# Altium PCB VideoMuxBoard.PcbDoc (part 1 of 2)
Units mil, origin at the board's own origin, x right, y up, seen from the top; angles counter-clockwise.
Board outline 4724.41 x 4724.41 mil, 4 copper layers (Top Layer, Ground, MidLayer1, Bottom Layer); 247 components, 183 nets, 999 pads, 433 vias.
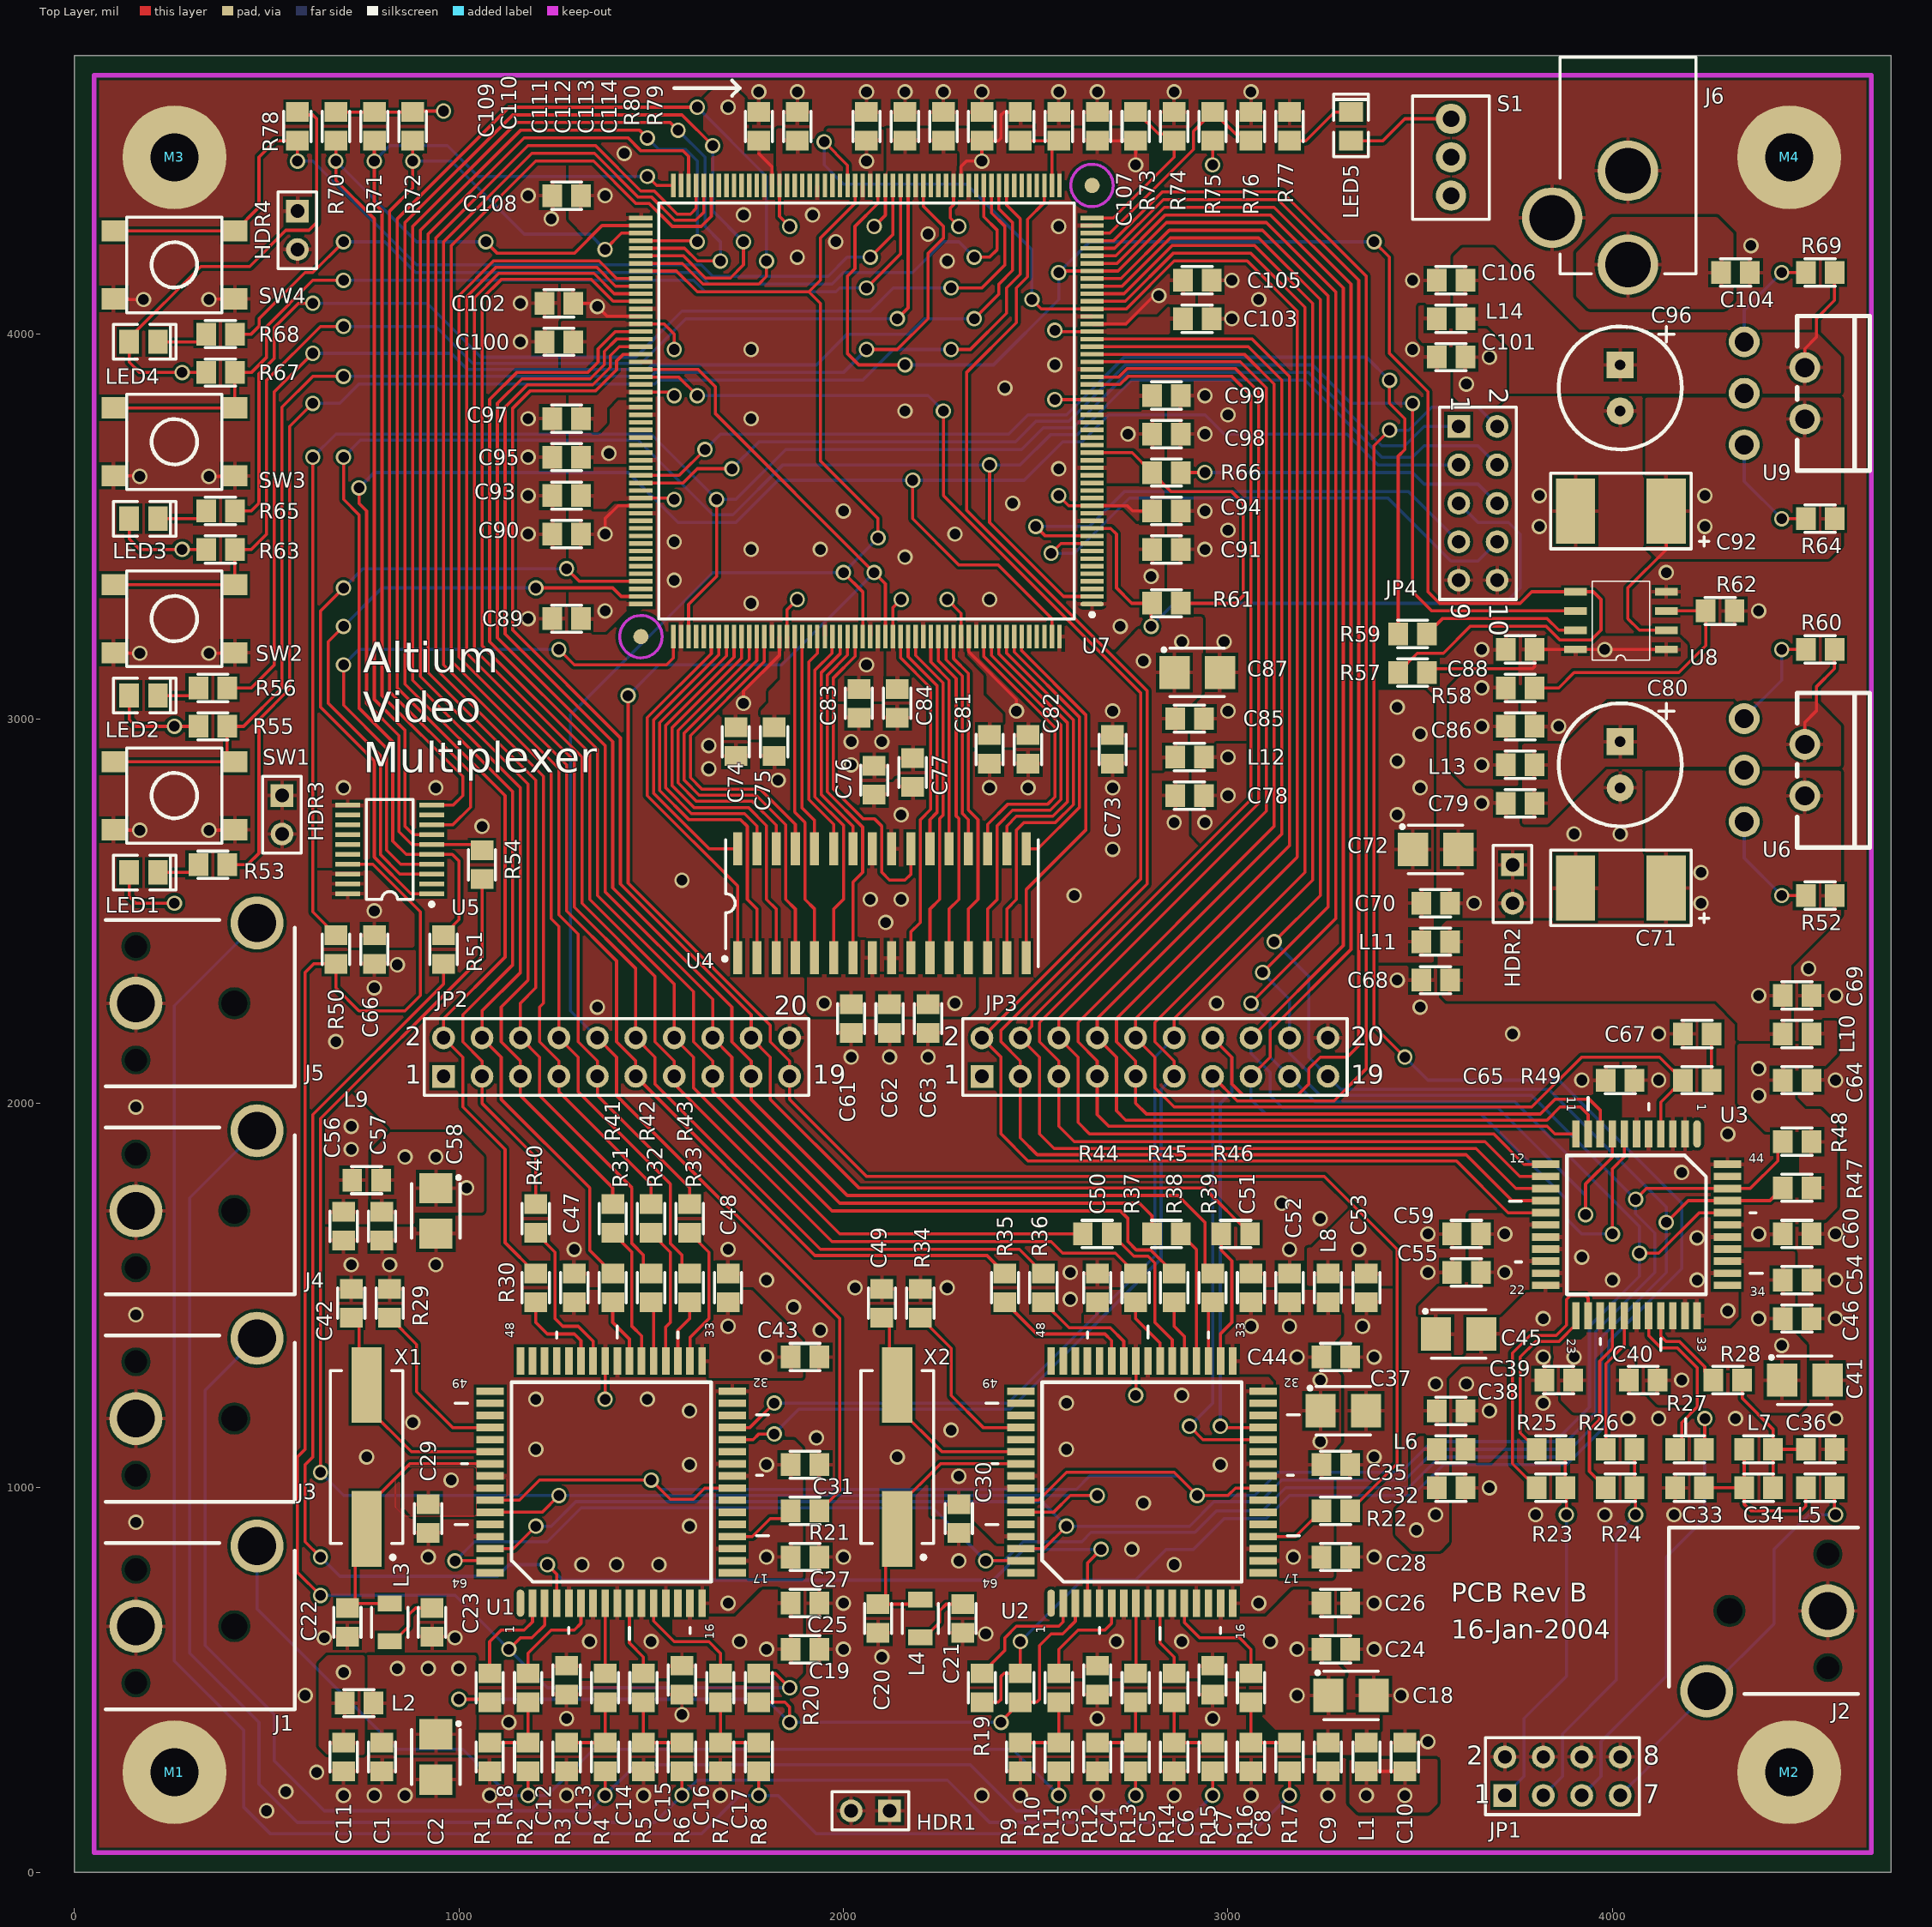
[diagram p0: Top Layer view]
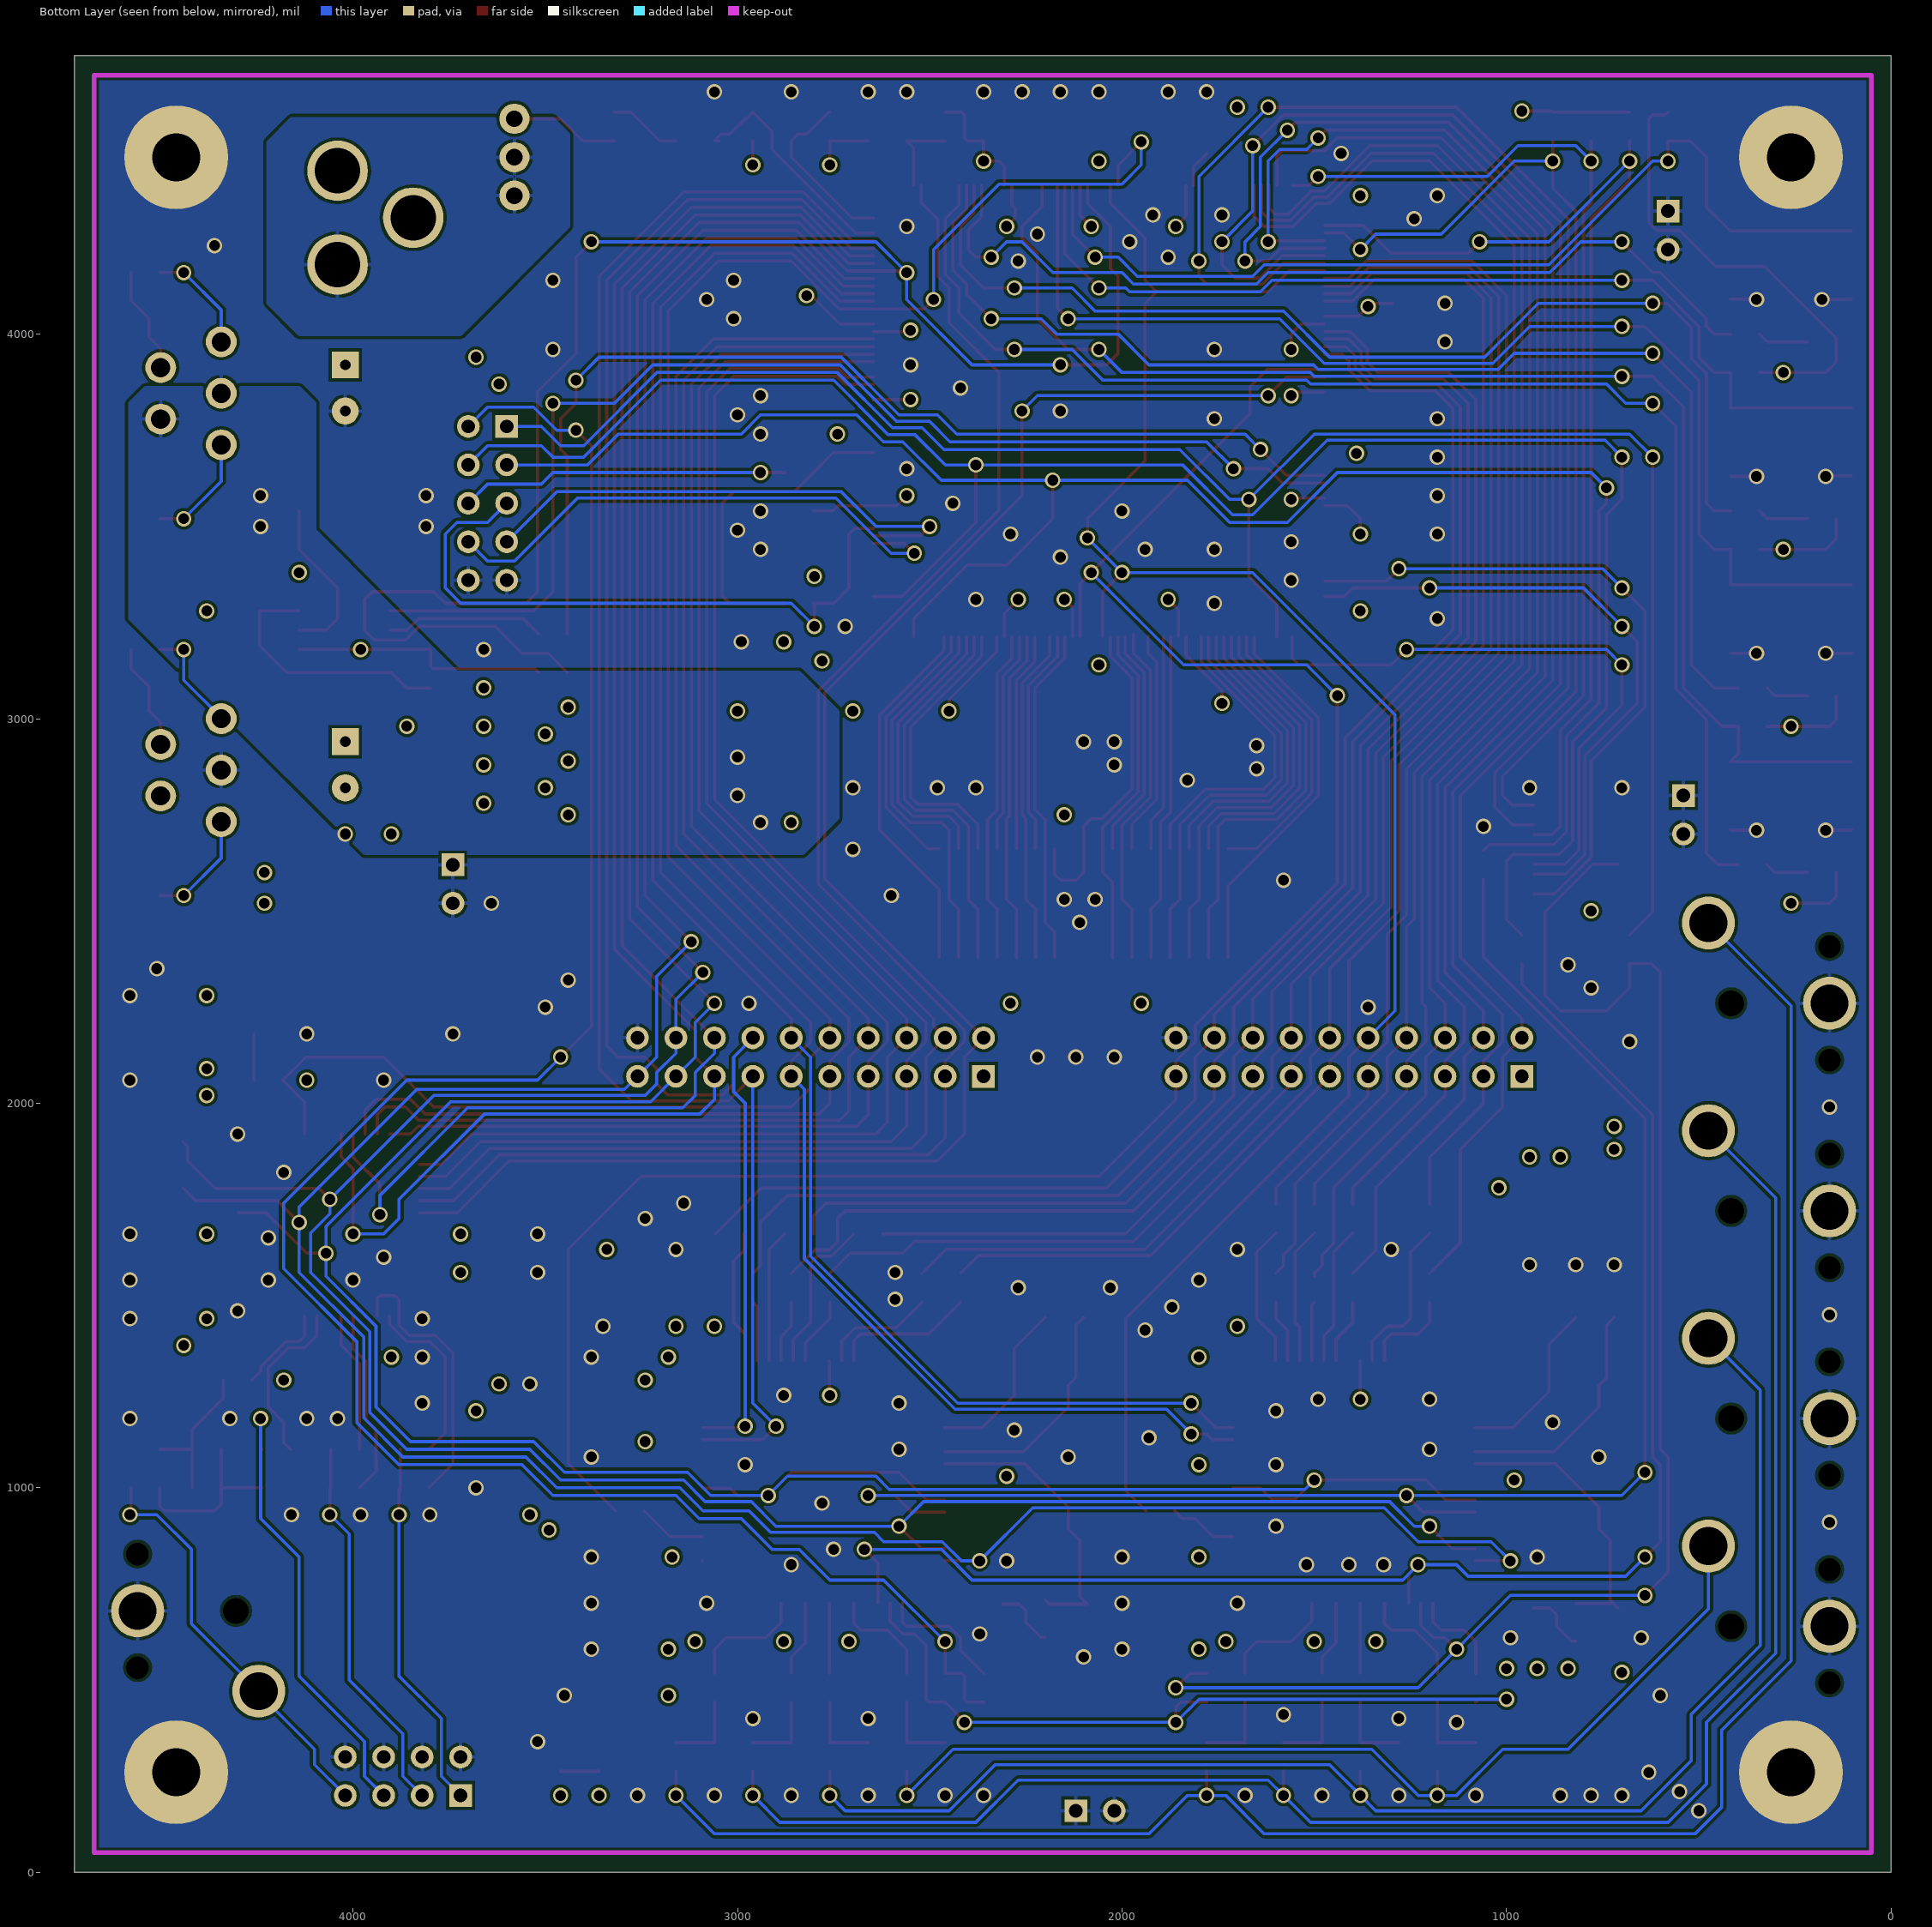
[diagram p1: Bottom Layer view, seen from below]
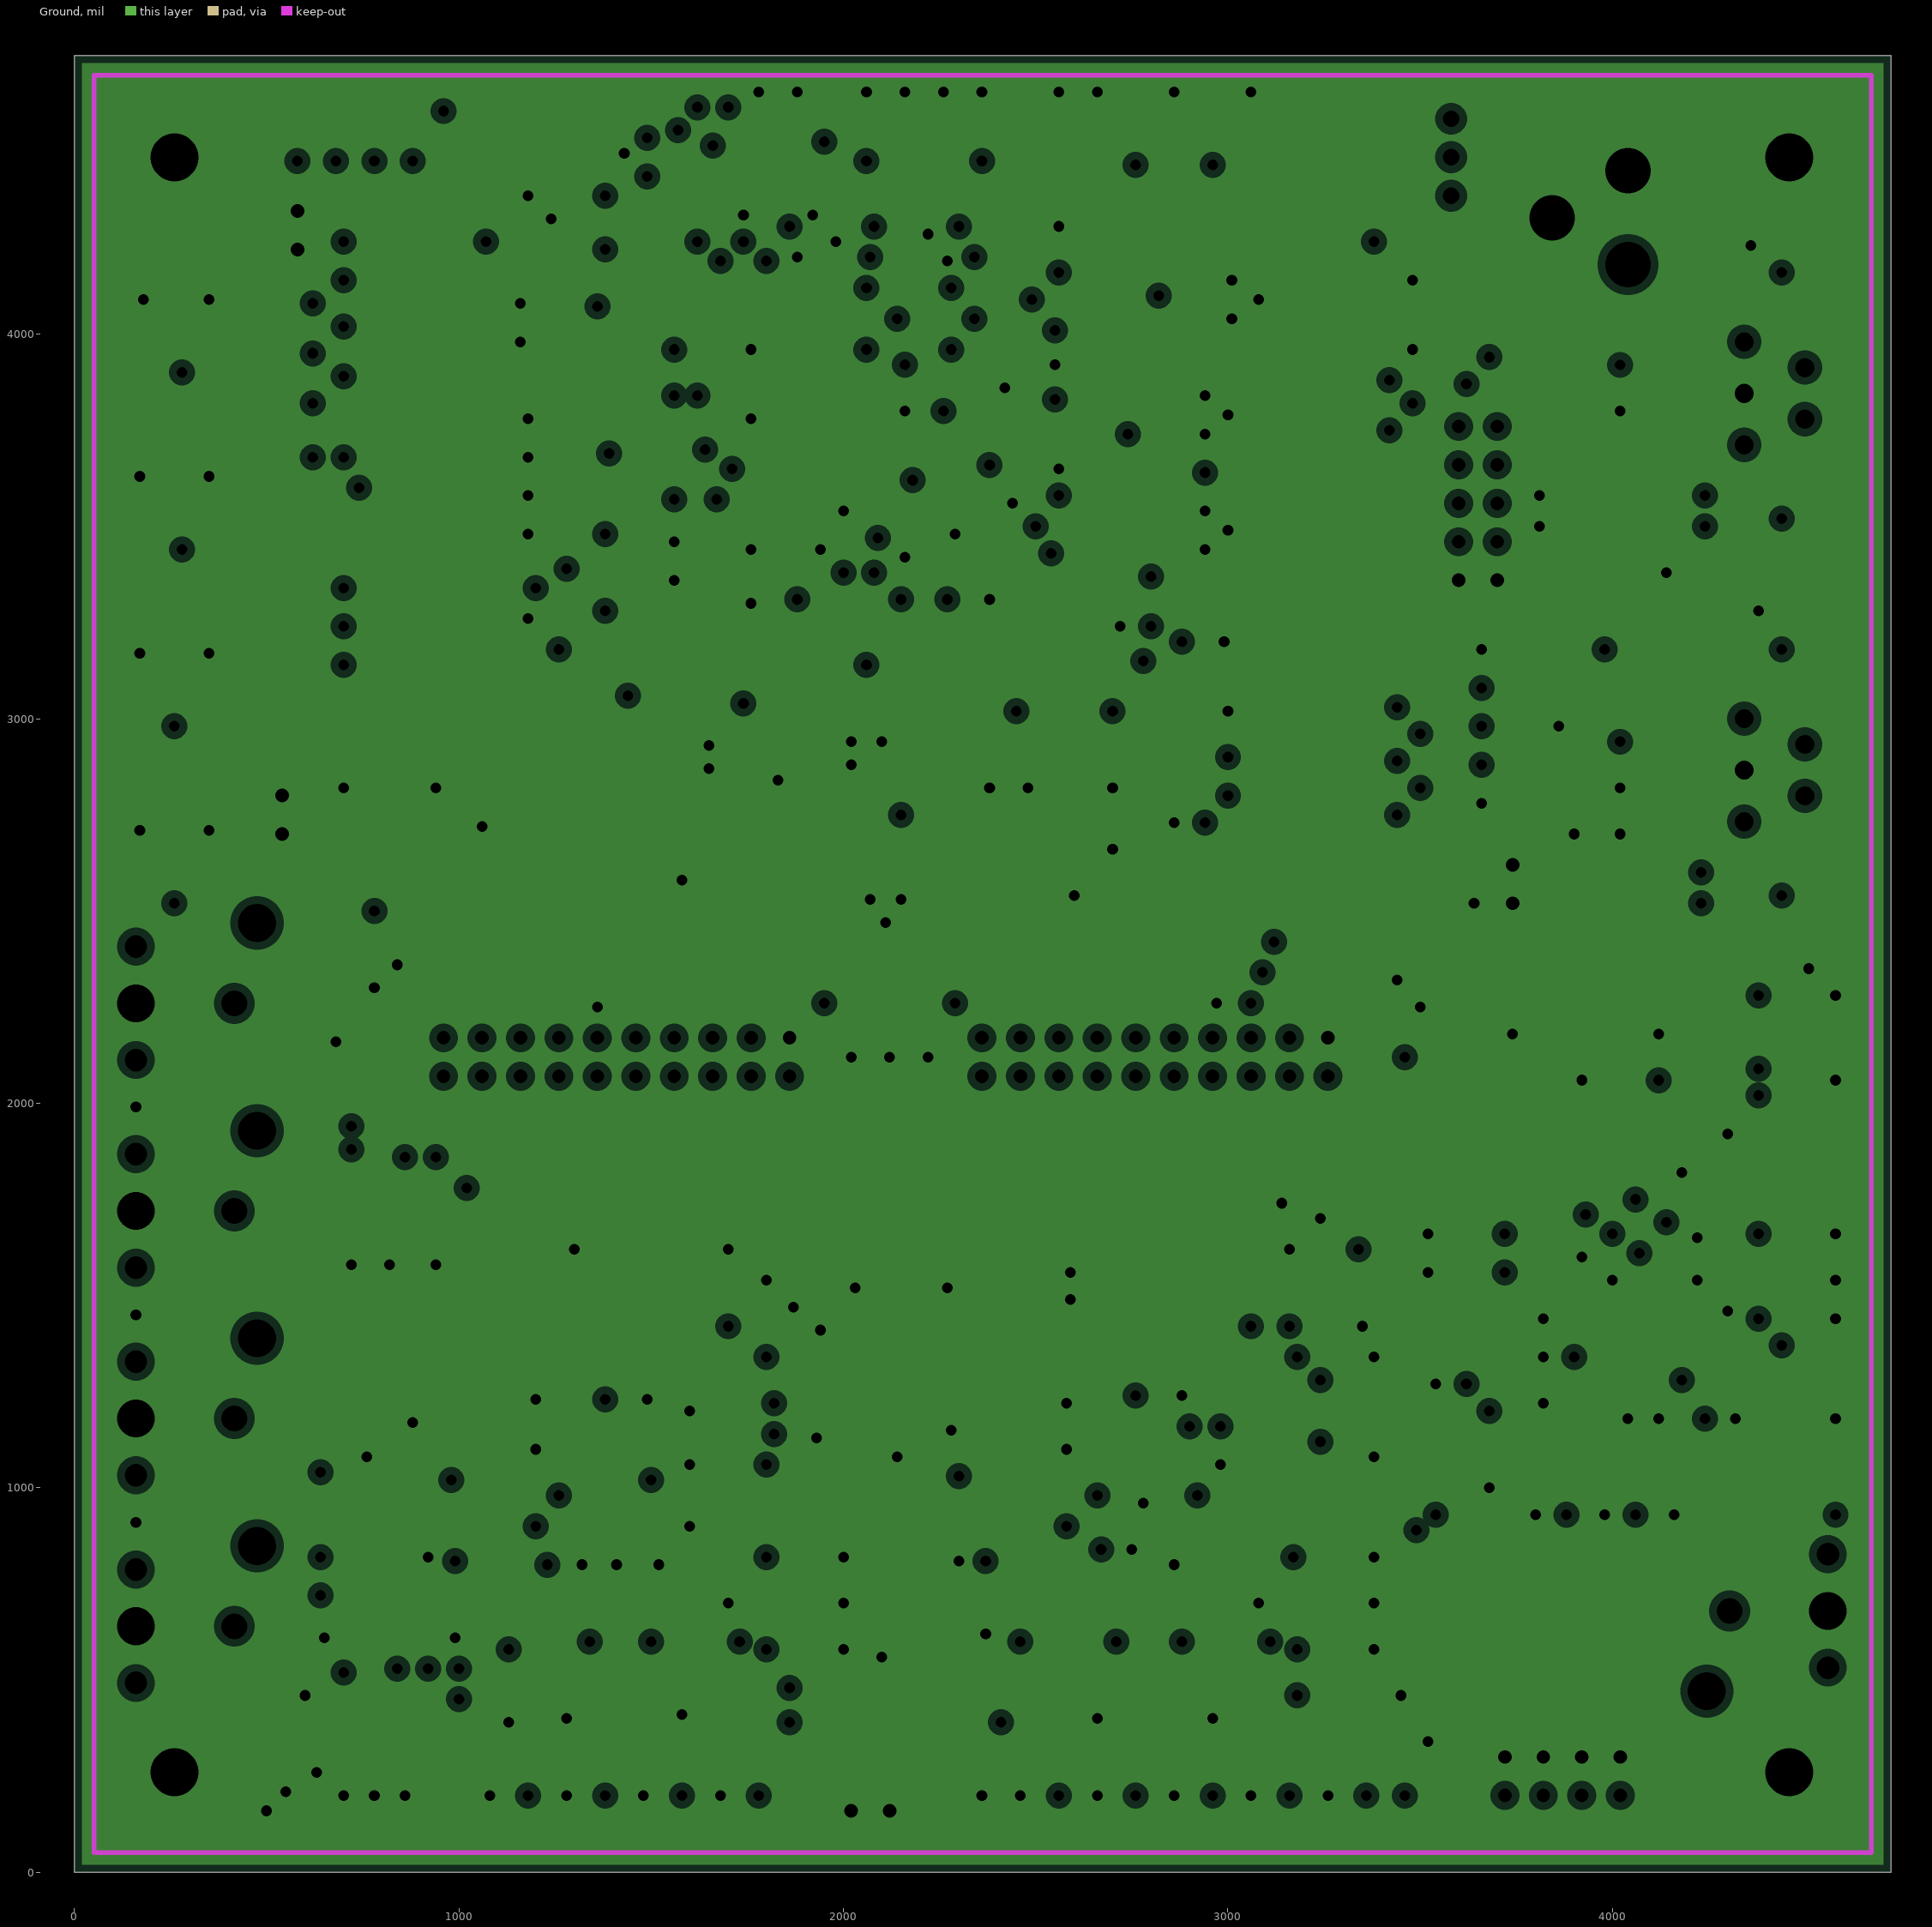
[diagram p2: Ground, clearances drawn from the general rule]
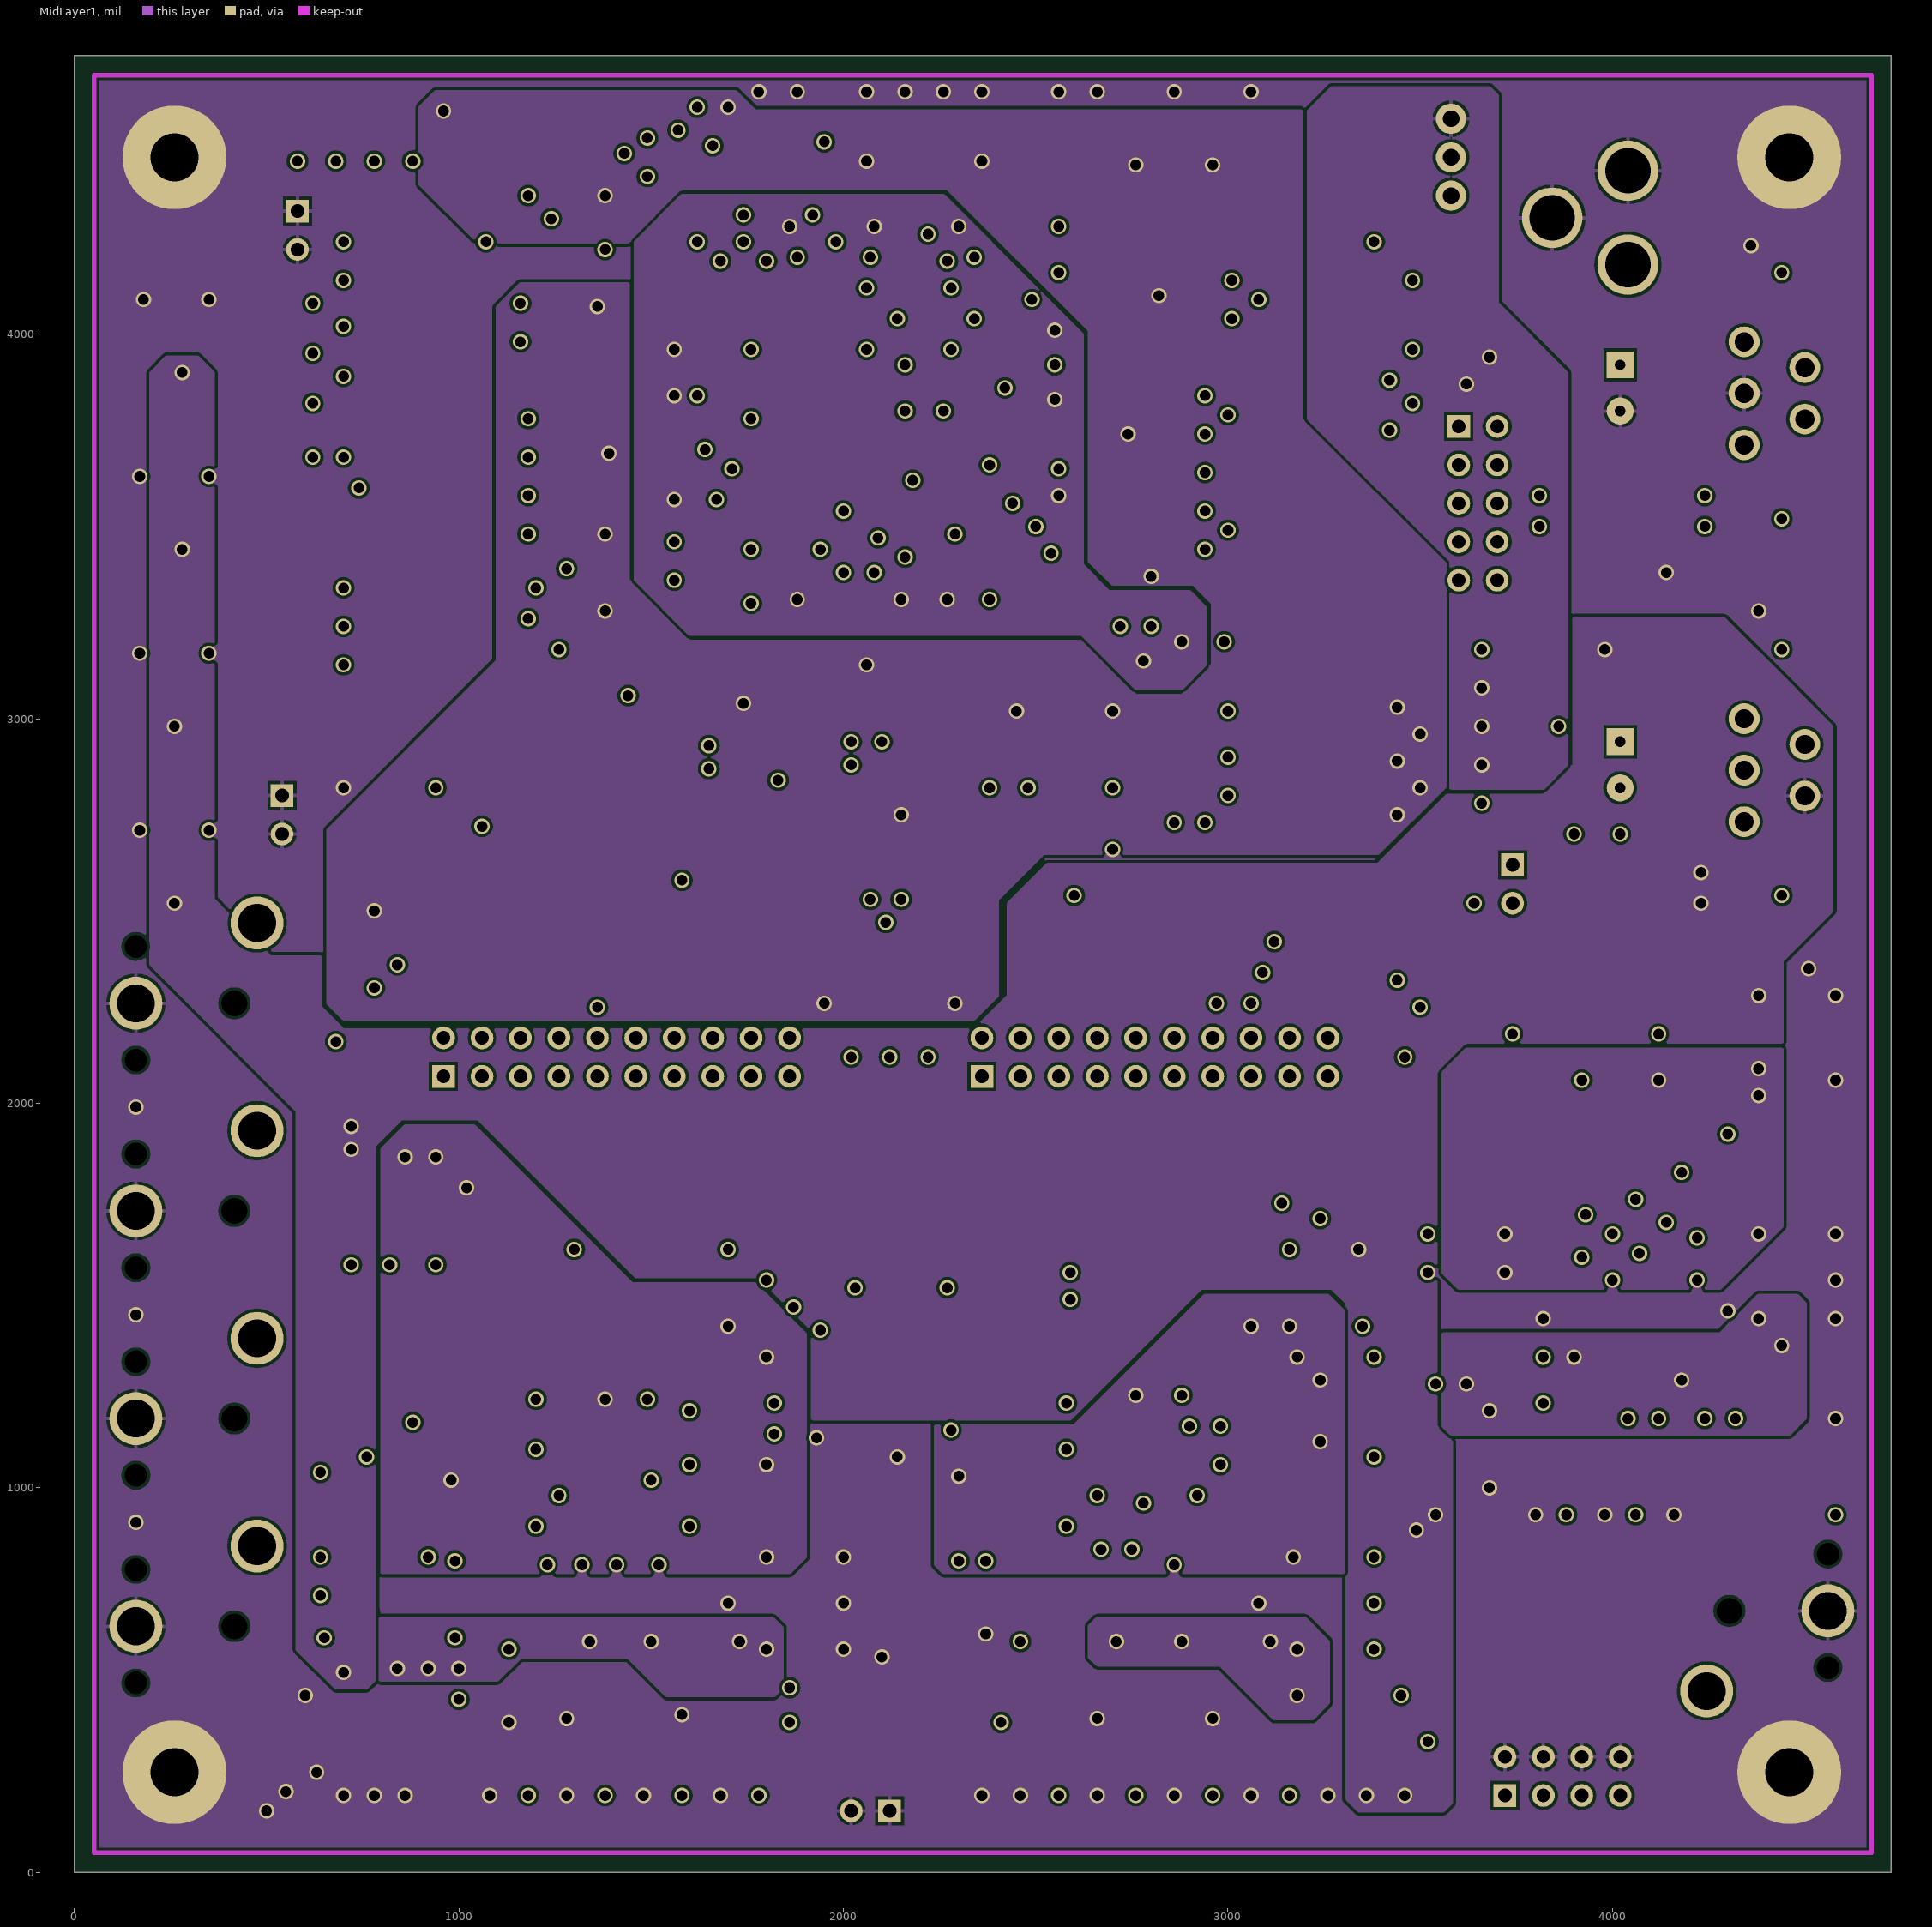
[diagram p3: MidLayer1]

## Layer stack, top to bottom
Top Layer: signal copper 1.4
Dielectric: core 12.6, FR-4, Dk 4.8
Ground: plane copper 1.4, net GND
Dielectric: prepreg 12.6, FR-4, Dk 4.8
MidLayer1: signal copper 1.4
Dielectric: core 12.6, FR-4, Dk 4.8
Bottom Layer: signal copper 1.4

## Board outline
0,0 4724.41,0 4724.41,4724.41 0,4724.41

## Design rules (kind name [scope] priority, off if disabled: settings)
Clearance [All] p1: gap=7.87
FabricationTestPointUsage TestPointUsage [All] p1: valid=0 allowmultiple=FALSE
FabricationTestpoint Testpoint [All] p1: side=3 testpointundercomponent=TRUE minsize=40 maxsize=100 preferedsize=60 minholesize=0 maxholesize=40 preferedholesize=32 testpointgrid=1 allowsidetop=TRUE allowsidebottom=TRUE usegrid=TRUE gridtolerance=0.01
HoleSize [All] p1: absolutevalues=TRUE maxlimit=150 minlimit=24 maxpercent=80.000 minpercent=20.000
PlaneClearance [All] p1: clearance=20
PlaneConnect M3PlaneConnect [(HasFootprint('SCREW M3') AND InNet('GND'))] p1: planeconnectstyle=Direct reliefexpansion=20 reliefentries=4 reliefconductorwidth=10 reliefairgap=10 // Require no thermal relief on M3 screw holes.
PlaneConnect [All] p2: planeconnectstyle=Relief reliefexpansion=20 reliefentries=4 reliefconductorwidth=10 reliefairgap=10
PolygonConnect M3PolygonConnect [(HasFootprint('SCREW M3') AND InNet('GND'))] p1: connectstyle=Direct reliefconductorwidth=10 reliefentries=4 polygonreliefangle="90 Angle" // Require no thermal relief on M3 screw holes.
PolygonConnect [All] p2: connectstyle=Relief reliefconductorwidth=10 reliefentries=4 polygonreliefangle="90 Angle"
RoutingLayers [All] p1: top layer_v5=TRUE mid layer 1_v5=FALSE bottom layer_v5=TRUE
RoutingVias [All] p1: holewidth=24 width=40 viastyle="Through Hole" minholewidth=24 minwidth=40 maxholewidth=44 maxwidth=60
SilkscreenOverComponentPads [All] p1: minsilkscreentomaskgap=10
SolderMaskExpansion [All] p1: expansion=2
Width [All] p1: maxlimit=100 minlimit=7.87 preferedwidth=8 midlayer1_maxwidth=24
21 further rules are at their usual default settings.

## Classes and differential pairs
component class U_PCB_Controller: C61 C62 C63 C66 C68 C70 C72 C73 C74 C75 C76 C77 C78 C81 C82 C83 C84 C85 C87 C89 C90 C91 C93 C94 C95 C97 C98 C99 C100 C102 C103 C105 C107 C108 C109 C110 C111 C112 C113 C114 L11 L12 R50 R61 R70 R71 R72 R73 R74 R75 R76 R79 R80 U4 U5 U7
component class U_PCB_DecoderA: C1 C2 C11 C12 C13 C14 C15 C16 C17 C19 C22 C23 C25 C27 C29 C31 C42 C43 C47 C48 C56 C57 C58 L2 L3 L9 R1 R2 R3 R4 R5 R6 R7 R8 R18 R20 R21 R29 R30 R31 R32 R33 R40 R41 R42 R43 U1 X1
component class U_PCB_DecoderB: C3 C4 C5 C6 C7 C8 C9 C10 C18 C20 C21 C24 C26 C28 C30 C35 C37 C44 C49 C50 C51 C52 C53 L1 L4 L8 R9 R10 R11 R12 R13 R14 R15 R16 R17 R19 R22 R34 R35 R36 R37 R38 R39 R44 R45 R46 U2 X2
component class U_PCB_Encoder: C32 C33 C34 C36 C38 C39 C40 C41 C45 C46 C54 C55 C59 C60 C64 C65 C67 C69 J2 JP1 L5 L6 L7 L10 R23 R24 R25 R26 R27 R28 R47 R48 R49 U3
component class U_PCB_Headers: JP2 JP3 JP4 R66
component class U_PCB_IO: J1 J3 J4 J5 LED1 LED2 LED3 LED4 LED5 R53 R55 R56 R63 R65 R67 R68 R77 R78 SW1 SW2 SW3 SW4
component class U_PCB_Power: C71 C79 C80 C86 C88 C92 C96 C101 C104 C106 HDR1 HDR2 HDR3 HDR4 J6 L13 L14 R52 R57 R58 R59 R60 R62 R64 R69 S1 U6 U8 U9
net class A[16..0]: A0 A1 A2 A3 A4 A5 A6 A7 A8 A9 A10 A11 A12 A13 A14 A15 A16
net class D[7..0]: D0 D1 D2 D3 D4 D5 D6 D7
net class KEY[3..0]: KEY0 KEY1 KEY2 KEY3
net class LED[3..0]: LED0 LED3 LED4 LED5
net class MP[7..0]: MPOUT0 MPOUT1 MPOUT2 MPOUT3 MPOUT4 MPOUT5 MPOUT6 MPOUT7
component class PCB_Top: R51 R54

## Components (designator, comment, footprint, x,y, rotation, side; value= is the part's Value field where it differs from the comment)
C1 "0.1uF" CC2012-0805 800,300 r270 top (schematic designator C54)
C2 "10uF" MCCT-B 940,300 r270 top (schematic designator C56)
C3 "22nF" CC2012-0805 2560,480 r90 top (schematic designator C86)
C4 "10nF" CC2012-0805 2660,500 r90 top (schematic designator C73)
C5 "22nF" CC2012-0805 2760,480 r90 top (schematic designator C85)
C6 "22nF" CC2012-0805 2860,480 r90 top (schematic designator C84)
C7 "10nF" CC2012-0805 2960,500 r90 top (schematic designator C74)
C8 "22nF" CC2012-0805 3060,480 r90 top (schematic designator C83)
C9 "0.1uF" CC2012-0805 3260,300 r270 top (schematic designator C77)
C10 "1nF" CC2012-0805 3460,300 r90 top (schematic designator C67)
C11 "1nF" CC2012-0805 700,300 r270 top (schematic designator C44)
C12 "22nF" CC2012-0805 1180,480 r90 top (schematic designator C63)
C13 "10nF" CC2012-0805 1280,500 r90 top (schematic designator C50)
C14 "22nF" CC2012-0805 1380,480 r90 top (schematic designator C62)
C15 "22nF" CC2012-0805 1480,480 r90 top (schematic designator C61)
C16 "10nF" CC2012-0805 1580,500 r90 top (schematic designator C51)
C17 "22nF" CC2012-0805 1680,480 r90 top (schematic designator C60)
C18 "10uF" MCCT-B 3320,460 r0 top (schematic designator C79)
C19 "1nF" CC2012-0805 1900,580 r180 top (schematic designator C43)
C20 "10pF" CC2012-0805 2090,660 r90 top (schematic designator C81)
C21 "1nF" CC2012-0805 2310,660 r90 top (schematic designator C64)
C22 "10pF" CC2012-0805 710,650 r90 top (schematic designator C58)
C23 "1nF" CC2012-0805 930,650 r90 top (schematic designator C41)
C24 "1nF" CC2012-0805 3280,580 r180 top (schematic designator C66)
C25 "1nF" CC2012-0805 1900,700 r180 top (schematic designator C42)
C26 "1nF" CC2012-0805 3280,700 r180 top (schematic designator C65)
C27 "10nF" CC2012-0805 1900,820 r0 top (schematic designator C53)
C28 "10nF" CC2012-0805 3280,820 r0 top (schematic designator C76)
C29 "100nF" CC2012-0805 920,920 r270 top (schematic designator C47)
C30 "100nF" CC2012-0805 2300,920 r270 top (schematic designator C70)
C31 "1nF" CC2012-0805 1900,1060 r0 top (schematic designator C49)
C32 "1nF" CC2012-0805 3580,1000 r0 top (schematic designator C90)
C33 "470pF" CC2012-0805 4200,1000 r180 top (schematic designator C102)
C34 "100pF" CC2012-0805 4380,1000 r180 top (schematic designator C104)
C35 "1nF" CC2012-0805 3280,1060 r0 top (schematic designator C72)
C36 "330pF" CC2012-0805 4540,1100 r0 top (schematic designator C103)
C37 "10uF" MCCT-B 3300,1200 r0 top (schematic designator C80)
C38 "0.1uF" CC2012-0805 3580,1200 r180 top (schematic designator C99)
C39 "1nF" CC2012-0805 3860,1280 r180 top (schematic designator C92)
C40 "10nF" CC2012-0805 4080,1280 r180 top (schematic designator C97)
C41 "10uF" MCCT-B 4500,1280 r0 top (schematic designator C101)
C42 "10pF" CC2012-0805 720,1480 r90 top (schematic designator C59)
C43 "1nF" CC2012-0805 1900,1340 r0 top (schematic designator C45)
C44 "1nF" CC2012-0805 3280,1340 r0 top (schematic designator C68)
C45 "10uF" MCCT-B 3600,1400 r0 top (schematic designator C100)
C46 "10nF" CC2012-0805 4480,1440 r0 top (schematic designator C96)
C47 "1nF" CC2012-0805 1300,1520 r90 top (schematic designator C48)
C48 "10nF" CC2012-0805 1700,1520 r90 top (schematic designator C52)
C49 "10pF" CC2012-0805 2100,1480 r90 top (schematic designator C82)
C50 "1nF" CC2012-0805 2660,1520 r90 top (schematic designator C71)
C51 "10nF" CC2012-0805 3060,1520 r90 top (schematic designator C75)
C52 "0.1uF" CC2012-0805 3160,1520 r90 top (schematic designator C78)
C53 "1nF" CC2012-0805 3360,1520 r270 top (schematic designator C69)
C54 "1nF" CC2012-0805 4480,1540 r0 top (schematic designator C91)
C55 "10nF" CC2012-0805 3620,1560 r0 top (schematic designator C94)
C56 "1nF" CC2012-0805 700,1680 r270 top (schematic designator C46)
C57 "0.1uF" CC2012-0805 800,1680 r270 top (schematic designator C55)
C58 "10uF" MCCT-B 940,1720 r270 top (schematic designator C57)
C59 "1nF" CC2012-0805 3620,1660 r0 top (schematic designator C88)
C60 "10nF" CC2012-0805 4480,1660 r180 top (schematic designator C95)
C61 "0.1uF" CC2012-0805 2020,2220 r270 top (schematic designator C32)
C62 "1nF" CC2012-0805 2120,2220 r270 top (schematic designator C2)
C63 "10nF" CC2012-0805 2220,2220 r270 top (schematic designator C22)
C64 "0.1uF" CC2012-0805 4480,2060 r0 top (schematic designator C98)
C65 "1nF" CC2012-0805 4020,2060 r0 top (schematic designator C87)
C66 "10nF" CC2012-0805 780,2400 r270 top (schematic designator C27)
C67 "10nF" CC2012-0805 4220,2180 r180 top (schematic designator C93)
C68 "1nF" CC2012-0805 3540,2320 r180 top (schematic designator C20)
C69 "1nF" CC2012-0805 4480,2280 r0 top (schematic designator C89)
C70 "0.1uF" CC2012-0805 3540,2520 r0 top (schematic designator C38)
C71 "47uF" MCCTD 4140,2560 r180 top (schematic designator C113)
C72 "10uF" MCCT-B 3540,2660 r0 top (schematic designator C40)
C73 "10nF" CC2012-0805 2700,2920 r270 top (schematic designator C24)
C74 "1nF" CC2012-0805 1720,2940 r270 top (schematic designator C5)
C75 "1nF" CC2012-0805 1820,2940 r270 top (schematic designator C15)
C76 "1nF" CC2012-0805 2080,2840 r90 top (schematic designator C1)
C77 "10nF" CC2012-0805 2180,2860 r90 top (schematic designator C21)
C78 "1nF" CC2012-0805 2900,2800 r180 top (schematic designator C19)
C79 "0.1uF" CC2012-0805 3760,2780 r180 top (schematic designator C109)
C80 "470uF 16V" RB8/3.5 4020,2880 r0 top (schematic designator C111)
C81 "10nF" CC2012-0805 2380,2920 r90 top (schematic designator C30)
C82 "1nF" CC2012-0805 2480,2920 r270 top (schematic designator C7)
C83 "10nF" CC2012-0805 2040,3040 r270 top (schematic designator C25)
C84 "0.1uF" CC2012-0805 2140,3040 r270 top (schematic designator C35)
C85 "0.1uF" CC2012-0805 2900,3000 r0 top (schematic designator C36)
C86 "1nF" CC2012-0805 3760,2980 r0 top (schematic designator C105)
C87 "10uF" MCCT-B 2920,3120 r0 top (schematic designator C39)
C88 "10nF" CC2012-0805 3760,3180 r180 top (schematic designator C108)
C89 "1nF" CC2012-0805 1280,3260 r180 top (schematic designator C4)
C90 "1nF" CC2012-0805 1280,3480 r180 top (schematic designator C12)
C91 "0.1uF" CC2012-0805 2840,3440 r0 top (schematic designator C34)
C92 "47uF" MCCTD 4140,3540 r180 top (schematic designator C114)
C93 "1nF" CC2012-0805 1280,3580 r180 top (schematic designator C14)
C94 "1nF" CC2012-0805 2840,3540 r0 top (schematic designator C16)
C95 "1nF" CC2012-0805 1280,3680 r180 top (schematic designator C11)
C96 "470uF 16V" RB8/3.5 4020,3860 r0 top (schematic designator C112)
C97 "10nF" CC2012-0805 1280,3780 r0 top (schematic designator C29)
C98 "1nF" CC2012-0805 2840,3740 r0 top (schematic designator C3)
C99 "10nF" CC2012-0805 2840,3840 r180 top (schematic designator C31)
C100 "1nF" CC2012-0805 1260,3980 r180 top (schematic designator C18)
C101 "1nF" CC2012-0805 3580,3940 r180 top (schematic designator C107)
C102 "1nF" CC2012-0805 1260,4080 r180 top (schematic designator C10)
C103 "1nF" CC2012-0805 2920,4040 r0 top (schematic designator C17)
C104 "1nF" CC2012-0805 4320,4160 r0 top (schematic designator C106)
C105 "10nF" CC2012-0805 2920,4140 r0 top (schematic designator C23)
C106 "0.1uF" CC2012-0805 3580,4140 r180 top (schematic designator C110)
C107 "1nF" CC2012-0805 2660,4540 r90 top (schematic designator C8)
C108 "10nF" CC2012-0805 1280,4360 r180 top (schematic designator C26)
C109 "0.1uF" CC2012-0805 1780,4540 r90 top (schematic designator C33)
C110 "10nF" CC2012-0805 1880,4540 r270 top (schematic designator C28)
C111 "1nF" CC2012-0805 2060,4540 r90 top (schematic designator C6)
C112 "0.1uF" CC2012-0805 2160,4540 r270 top (schematic designator C37)
C113 "1nF" CC2012-0805 2260,4540 r90 top (schematic designator C13)
C114 "1nF" CC2012-0805 2360,4540 r90 top (schematic designator C9)
HDR1 "Header 2" HDR1X2 2120,160 r180 top (schematic designator HDR3)
HDR2 "Header 2" HDR1X2 3740,2620 r270 top (schematic designator HDR1)
HDR3 "Header 2" HDR1X2 540,2800 r270 top (schematic designator HDR2)
HDR4 "Header 2" HDR1X2 580,4320 r270 top
J1 "RCA" RCA_MR551L 160,640 r0 top (schematic designator J5)
J2 "RCA" RCA_MR551L 4560,680 r180 top (schematic designator J1)
J3 "RCA" RCA_MR551L 160,1180 r0 top (schematic designator J4)
J4 "RCA" RCA_MR551L 160,1720 r0 top (schematic designator J3)
J5 "RCA" RCA_MR551L 160,2260 r0 top (schematic designator J2)
J6 "PWR2.5" PWR2.5 4040,4720 r270 top
JP1 "Header 4X2" HDR2X4 3720,200 r0 top
JP2 "Header 10X2" HDR2X10 960,2070 r0 top (schematic designator JP3)
JP3 "Header 10X2" HDR2X10 2360,2070 r0 top (schematic designator JP4)
JP4 "Header 5X2" HDR2X5 3600,3760 r270 top (schematic designator JP2)
L1 "300R" CC2012-0805 3360,300 r90 top (schematic designator L7)
L2 "300R" CC2012-0805 740,440 r0 top (schematic designator L4)
L3 "Inductor" SIMID1008-A 820,650 r90 top
L4 "Inductor" SIMID1008-A 2200,660 r90 top (schematic designator L6)
L5 "Inductor" CC2012-0805 4540,1000 r0 top (schematic designator L10)
L6 "300R" CC2012-0805 3580,1100 r0 top (schematic designator L13)
L7 "Inductor" CC2012-0805 4380,1100 r180 top (schematic designator L9)
L8 "300R" CC2012-0805 3260,1520 r270 top
L9 "300R" CC2012-0805 760,1800 r0 top (schematic designator L5)
L10 "300R" CC2012-0805 4480,2180 r0 top (schematic designator L12)
L11 "60R" CC2012-0805 3540,2420 r180 top (schematic designator L2)
L12 "60R" CC2012-0805 2900,2900 r180 top (schematic designator L1)
L13 "60R" CC2012-0805 3760,2880 r0 top (schematic designator L14)
L14 "60R" CC2012-0805 3580,4040 r0 top (schematic designator L15)
LED1 "HSMX-C670" "SMD _LED" 180,2600 r180 top (schematic designator LED5)
LED2 "HSMX-C670" "SMD _LED" 180,3060 r180 top (schematic designator LED4)
LED3 "HSMX-C670" "SMD _LED" 180,3520 r180 top
LED4 "HSMX-C670" "SMD _LED" 180,3980 r180 top (schematic designator LED2)
LED5 "HSMX-C670" "SMD _LED" 3320,4540 r270 top (schematic designator LED1)
M1 "Comment" "SCREW M3" 260,260 r0 top
M2 "Comment" "SCREW M3" 4460,260 r0 top
M3 "Comment" "SCREW M3" 260,4460 r0 top
M4 "Comment" "SCREW M3" 4460,4460 r0 top
R1 "100" CC2012-0805 1080,300 r90 top (schematic designator R24)
R2 "47" CC2012-0805 1180,300 r90 top (schematic designator R30)
R3 "100" CC2012-0805 1280,300 r90 top (schematic designator R23)
R4 "47" CC2012-0805 1380,300 r90 top (schematic designator R29)
R5 "100" CC2012-0805 1480,300 r90 top (schematic designator R21)
R6 "47" CC2012-0805 1580,300 r90 top (schematic designator R28)
R7 "100" CC2012-0805 1680,300 r90 top (schematic designator R16)
R8 "47" CC2012-0805 1780,300 r90 top (schematic designator R27)
R9 "100" CC2012-0805 2460,300 r90 top (schematic designator R43)
R10 "0" CC2012-0805 2460,480 r90 top (schematic designator R31)
R11 "47" CC2012-0805 2560,300 r90 top (schematic designator R49)
R12 "100" CC2012-0805 2660,300 r90 top (schematic designator R42)
R13 "47" CC2012-0805 2760,300 r90 top (schematic designator R48)
R14 "100" CC2012-0805 2860,300 r90 top (schematic designator R40)
R15 "47" CC2012-0805 2960,300 r90 top (schematic designator R47)
R16 "100" CC2012-0805 3060,300 r90 top (schematic designator R35)
R17 "47" CC2012-0805 3160,300 r90 top (schematic designator R46)
R18 "100" CC2012-0805 1080,480 r90 top (schematic designator R12)
R19 "100" CC2012-0805 2360,480 r90 top (schematic designator R58)
R20 "100" CC2012-0805 1780,480 r270 top (schematic designator R77)
R21 "100" CC2012-0805 1900,940 r180 top (schematic designator R25)
R22 "100" CC2012-0805 3280,940 r180 top (schematic designator R44)
R23 "10" CC2012-0805 3840,1000 r0 top (schematic designator R53)
R24 "22" CC2012-0805 4020,1000 r0 top (schematic designator R56)
R25 "22" CC2012-0805 3840,1100 r0 top (schematic designator R55)
R26 "10" CC2012-0805 4020,1100 r0 top (schematic designator R54)
R27 "22" CC2012-0805 4200,1100 r0 top (schematic designator R80)
R28 "4.7" CC2012-0805 4300,1280 r0 top (schematic designator R57)
R29 "1k" CC2012-0805 820,1480 r270 top (schematic designator R26)
R30 "100" CC2012-0805 1200,1520 r270 top (schematic designator R22)
R31 "100" CC2012-0805 1400,1520 r270 top (schematic designator R19)
R32 "100" CC2012-0805 1500,1520 r270 top (schematic designator R17)
R33 "100" CC2012-0805 1600,1520 r270 top (schematic designator R14)
R34 "1k" CC2012-0805 2200,1480 r270 top (schematic designator R45)
R35 "100" CC2012-0805 2420,1520 r270 top (schematic designator R41)
R36 "100" CC2012-0805 2520,1520 r270 top (schematic designator R39)
R37 "100" CC2012-0805 2760,1520 r270 top (schematic designator R38)
R38 "100" CC2012-0805 2860,1520 r270 top (schematic designator R36)
R39 "100" CC2012-0805 2960,1520 r270 top (schematic designator R33)
R40 "100" CC2012-0805 1200,1700 r270 top (schematic designator R20)
R41 "100" CC2012-0805 1400,1700 r270 top (schematic designator R18)
R42 "100" CC2012-0805 1500,1700 r270 top (schematic designator R15)
R43 "100" CC2012-0805 1600,1700 r270 top (schematic designator R13)
R44 "100" CC2012-0805 2660,1660 r0 top (schematic designator R37)
R45 "100" CC2012-0805 2840,1660 r0 top (schematic designator R34)
R46 "100" CC2012-0805 3020,1660 r180 top (schematic designator R32)
R47 "4K7" CC2012-0805 4480,1780 r0 top (schematic designator R50)
R48 "4K7" CC2012-0805 4480,1900 r0 top (schematic designator R51)
R49 "47" CC2012-0805 4220,2060 r0 top (schematic designator R52)
R50 "0" CC2012-0805 680,2400 r270 top (schematic designator R1)
R51 "0" CC2012-0805 960,2400 r270 top (schematic designator R79)
R52 "4k7" CC2012-0805 4540,2540 r0 top (schematic designator R70)
R53 "330" CC2012-0805 360,2620 r0 top (schematic designator R68)
R54 "0" CC2012-0805 1060,2620 r270 top (schematic designator R78)
R55 "4K7" CC2012-0805 360,2980 r0 top (schematic designator R63)
R56 "330" CC2012-0805 360,3080 r0 top (schematic designator R67)
R57 "4k7" CC2012-0805 3480,3120 r0 top (schematic designator R75)
R58 "680k" CC2012-0805 3760,3080 r0 top (schematic designator R73)
R59 "0" CC2012-0805 3480,3220 r0 top (schematic designator R76)
R60 "4k7" CC2012-0805 4540,3180 r0 top (schematic designator R69)
R61 "0" CC2012-0805 2840,3300 r0 top (schematic designator R2)
R62 "270k" CC2012-0805 4280,3280 r0 top (schematic designator R74)
R63 "4K7" CC2012-0805 380,3440 r0 top (schematic designator R62)
R64 "4k7" CC2012-0805 4540,3520 r0 top (schematic designator R72)
R65 "330" CC2012-0805 380,3540 r0 top (schematic designator R66)
R66 "100" CC2012-0805 2840,3640 r0 top (schematic designator R59)
R67 "4K7" CC2012-0805 380,3900 r0 top (schematic designator R61)
R68 "330" CC2012-0805 380,4000 r0 top (schematic designator R65)
R69 "4k7" CC2012-0805 4540,4160 r0 top (schematic designator R71)
R70 "4K7" CC2012-0805 680,4540 r270 top (schematic designator R11)
R71 "4K7" CC2012-0805 780,4540 r270 top (schematic designator R10)
R72 "4K7" CC2012-0805 880,4540 r270 top (schematic designator R9)
R73 "0" CC2012-0805 2760,4540 r90 top (schematic designator R3)
R74 "0" CC2012-0805 2860,4540 r90 top (schematic designator R6)
R75 "0" CC2012-0805 2960,4540 r90 top (schematic designator R4)
R76 "0" CC2012-0805 3060,4540 r90 top (schematic designator R7)
R77 "560" CC2012-0805 3160,4540 r90 top (schematic designator R64)
R78 "4K7" CC2012-0805 580,4540 r270 top (schematic designator R60)
R79 "0" CC2012-0805 2560,4540 r90 top (schematic designator R8)
R80 "0" CC2012-0805 2460,4540 r270 top (schematic designator R5)
S1 "SPST" PCB_SWITCH 3580,4560 r0 top
SW1 "B3FS" B3FS_SWITCH 260,2800 r0 top (schematic designator SW4)
SW2 "B3FS" B3FS_SWITCH 260,3260 r0 top (schematic designator SW3)
SW3 "B3FS" B3FS_SWITCH 260,3720 r0 top (schematic designator SW2)
SW4 "B3FS" B3FS_SWITCH 260,4180 r0 top (schematic designator SW1)
U1 "SAA7111A" QFP14X14_64 1160,700 r90 top (schematic designator U4)
U2 "SAA7111A" QFP14X14_64 2540,700 r90 top (schematic designator U5)
U3 "SAA7127H" QFP10X10_44 4220,1920 r270 top (schematic designator U6)
U4 "IDT71V124SA15Y" SO-J32 2100,2520 r0 top (schematic designator U2)
U5 "XCF01SVO20C" VO20 820,2660 r90 top (schematic designator U3)
U6 "LP3961ET-3.3" TO220-5V 4500,3000 r270 top (schematic designator U7)
U7 "XC2S300E-6PQ208C" F-QFP28X28-G208/P.5N 2060,3800 r180 top (schematic designator U1)
U8 "TPS3306" SOIC8 4140,3180 r180 top (schematic designator U9)
U9 "LP3961ET-1.8" TO220-5V 4500,3980 r270 top (schematic designator U8)
X1 "24.576MHz" QC49/SMD 760,1080 r90 top
X2 "24.576MHz" QC49/SMD 2140,1080 r90 top

## Footprints (in the part's own frame and the unit in brackets; to place one, negate y for a bottom-side part, rotate by r counter-clockwise, add the part's x,y. Pads: shape width x height; smd on the part's side, far side on the other; paste and mask are expansions set on the pad)
B3FS_SWITCH [mm]
  rect 1.6x1.4 smd: 1(4.01,-2.25) 2(-4,-2.25) 3(4.01,2.24) 4(-4,2.24)
  silkscreen extent -3.16,-3.16 3.15,3.15
CC2012-0805 [mm]
  rect 1.3x1.5 smd: 1(-0.95,0) 2(0.95,0)
  silkscreen extent -1,-0.9 1,0.9
F-QFP28X28-G208/P.5N [mm]
  oval 1.55x0.3 smd: 1(-14.899,12.751)
  rect 1.55x0.3 smd: 2(-14.899,12.251) 3(-14.899,11.751) 4(-14.899,11.251) 5(-14.899,10.751) 6(-14.899,10.251) 7(-14.899,9.751) 8(-14.899,9.251) 9(-14.899,8.751) 10(-14.899,8.251) 11(-14.899,7.751) 12(-14.899,7.251) 13(-14.899,6.751) 14(-14.899,6.251) 15(-14.899,5.751) 16(-14.899,5.251) 17(-14.899,4.751) 18(-14.899,4.251) 19(-14.899,3.751) 20(-14.899,3.251) 21(-14.899,2.751) 22(-14.899,2.251) 23(-14.899,1.751) 24(-14.899,1.251) 25(-14.899,0.751) 26(-14.899,0.251) 27(-14.899,-0.249) 28(-14.899,-0.749) 29(-14.899,-1.249) 30(-14.899,-1.749) 31(-14.899,-2.249) 32(-14.899,-2.749) 33(-14.899,-3.249) 34(-14.899,-3.749) 35(-14.899,-4.249) 36(-14.899,-4.749) 37(-14.899,-5.249) 38(-14.899,-5.749) 39(-14.899,-6.249) 40(-14.899,-6.749) 41(-14.899,-7.249) 42(-14.899,-7.749) 43(-14.899,-8.249) 44(-14.899,-8.749) 45(-14.899,-9.249) 46(-14.899,-9.749) 47(-14.899,-10.249) 48(-14.899,-10.749) 49(-14.899,-11.249) 50(-14.899,-11.749) 51(-14.899,-12.249) 52(-14.899,-12.749) 105(14.901,-12.749) 106(14.901,-12.249) 107(14.901,-11.749) 108(14.901,-11.249) 109(14.901,-10.749) 110(14.901,-10.249) 111(14.901,-9.749) 112(14.901,-9.249) 113(14.901,-8.749) 114(14.901,-8.249) 115(14.901,-7.749) 116(14.901,-7.249) 117(14.901,-6.749) 118(14.901,-6.249) 119(14.901,-5.749) 120(14.901,-5.249) 121(14.901,-4.749) 122(14.901,-4.249) 123(14.901,-3.749) 124(14.901,-3.249) 125(14.901,-2.749) 126(14.901,-2.249) 127(14.901,-1.749) 128(14.901,-1.249) 129(14.901,-0.749) 130(14.901,-0.249) 131(14.901,0.251) 132(14.901,0.751) 133(14.901,1.251) 134(14.901,1.751) 135(14.901,2.251) 136(14.901,2.751) 137(14.901,3.251) 138(14.901,3.751) 139(14.901,4.251) 140(14.901,4.751) 141(14.901,5.251) 142(14.901,5.751) 143(14.901,6.251) 144(14.901,6.751) 145(14.901,7.251) 146(14.901,7.751) 147(14.901,8.251) 148(14.901,8.751) 149(14.901,9.251) 150(14.901,9.751) 151(14.901,10.251) 152(14.901,10.751) 153(14.901,11.251) 154(14.901,11.751) 155(14.901,12.251) 156(14.901,12.751)
  rect 0.3x1.55 smd: 53(-12.749,-14.899) 54(-12.249,-14.899) 55(-11.749,-14.899) 56(-11.249,-14.899) 57(-10.749,-14.899) 58(-10.249,-14.899) 59(-9.749,-14.899) 60(-9.249,-14.899) 61(-8.749,-14.899) 62(-8.249,-14.899) 63(-7.749,-14.899) 64(-7.249,-14.899) 65(-6.749,-14.899) 66(-6.249,-14.899) 67(-5.749,-14.899) 68(-5.249,-14.899) 69(-4.749,-14.899) 70(-4.249,-14.899) 71(-3.749,-14.899) 72(-3.249,-14.899) 73(-2.749,-14.899) 74(-2.249,-14.899) 75(-1.749,-14.899) 76(-1.249,-14.899) 77(-0.749,-14.899) 78(-0.249,-14.899) 79(0.251,-14.899) 80(0.751,-14.899) 81(1.251,-14.899) 82(1.751,-14.899) 83(2.251,-14.899) 84(2.751,-14.899) 85(3.251,-14.899) 86(3.751,-14.899) 87(4.251,-14.899) 88(4.751,-14.899) 89(5.251,-14.899) 90(5.751,-14.899) 91(6.251,-14.899) 92(6.751,-14.899) 93(7.251,-14.899) 94(7.751,-14.899) 95(8.251,-14.899) 96(8.751,-14.899) 97(9.251,-14.899) 98(9.751,-14.899) 99(10.251,-14.899) 100(10.751,-14.899) 101(11.251,-14.899) 102(11.751,-14.899) 103(12.251,-14.899) 104(12.751,-14.899) 157(12.751,14.901) 158(12.251,14.901) 159(11.751,14.901) 160(11.251,14.901) 161(10.751,14.901) 162(10.251,14.901) 163(9.751,14.901) 164(9.251,14.901) 165(8.751,14.901) 166(8.251,14.901) 167(7.751,14.901) 168(7.251,14.901) 169(6.751,14.901) 170(6.251,14.901) 171(5.751,14.901) 172(5.251,14.901) 173(4.751,14.901) 174(4.251,14.901) 175(3.751,14.901) 176(3.251,14.901) 177(2.751,14.901) 178(2.251,14.901) 179(1.751,14.901) 180(1.251,14.901) 181(0.751,14.901) 182(0.251,14.901) 183(-0.249,14.901) 184(-0.749,14.901) 185(-1.249,14.901) 186(-1.749,14.901) 187(-2.249,14.901) 188(-2.749,14.901) 189(-3.249,14.901) 190(-3.749,14.901) 191(-4.249,14.901) 192(-4.749,14.901) 193(-5.249,14.901) 194(-5.749,14.901) 195(-6.249,14.901) 196(-6.749,14.901) 197(-7.249,14.901) 198(-7.749,14.901) 199(-8.249,14.901) 200(-8.749,14.901) 201(-9.249,14.901) 202(-9.749,14.901) 203(-10.249,14.901) 204(-10.749,14.901) 205(-11.249,14.901) 206(-11.749,14.901) 207(-12.249,14.901) 208(-12.749,14.901)
  round 1 smd: FID1(-14.899,-14.899) FID2(14.901,14.901)
  Top Layer keep-out circle w0.2: c-14.899,-14.899 r1.4
  Top Layer keep-out circle w0.2: c14.901,14.901 r1.4
  silkscreen extent -15.02,-13.72 13.73,13.73
HDR1X2 [mm]
  rect 1.5x1.5 hole 0.9: 1(0,0)
  round 1.5 hole 0.9: 2(2.54,0)
  silkscreen extent -1.27,-1.27 3.81,1.27
HDR2X4 [mm]
  rect 1.5x1.5 hole 0.9: 1(0,0)
  round 1.5 hole 0.9: 2(0,2.54) 3(2.54,0) 4(2.54,2.54) 5(5.08,0) 6(5.08,2.54) 7(7.62,0) 8(7.62,2.54)
  silkscreen extent -1.27,-1.27 8.89,3.81
HDR2X5 [mm]
  rect 1.5x1.5 hole 0.9: 1(0,0)
  round 1.5 hole 0.9: 2(0,2.54) 3(2.54,0) 4(2.54,2.54) 5(5.08,0) 6(5.08,2.54) 7(7.62,0) 8(7.62,2.54) 9(10.16,0) 10(10.16,2.54)
  silkscreen extent -1.27,-1.27 11.43,3.81
HDR2X10 [mm]
  rect 1.5x1.5 hole 0.9: 1(0,0)
  round 1.5 hole 0.9: 2(0,2.54) 3(2.54,0) 4(2.54,2.54) 5(5.08,0) 6(5.08,2.54) 7(7.62,0) 8(7.62,2.54) 9(10.16,0) 10(10.16,2.54) 11(12.7,0) 12(12.7,2.54) 13(15.24,0) 14(15.24,2.54) 15(17.78,0) 16(17.78,2.54) 17(20.32,0) 18(20.32,2.54) 19(22.86,0) 20(22.86,2.54)
  silkscreen extent -1.27,-1.27 24.13,3.81
MCCT-B [mm]
  rect 2x2.2 smd: 1(-1.5,0) 2(1.5,0)
  silkscreen extent -2.3,-1.6 1.8,1.6
MCCTD [mm]
  rect 2.6x4.3 smd: 1(0,0) 2(6,0)
  silkscreen extent -2.8,-2.5 7.65,2.5
PCB_SWITCH [mm]
  round 2 hole 1.1: 1(0,-5.08) 2(0,-2.54) 3(0,0)
  silkscreen extent -2.54,-6.63 2.54,1.5
PWR2.5 [mm]
  round 4 hole 3: 1(13.7,0) 2(10.6,-5) 3(7.5,0)
  silkscreen extent 0,-4.47 14.3,4.5
QC49/SMD [mm]
  rect 5x2 smd: 1(-4.75,0) 2(4.75,0)
  silkscreen extent -6.75,-2.4 5.7,2.4
QFP10X10_44 [mm]
  oval 1.8x0.5 smd: 1(0,0)
  rect 1.8x0.5 smd: 2(0,-0.8) 3(0,-1.6) 4(0,-2.4) 5(0,-3.2) 6(0,-4) 7(0,-4.8) 8(0,-5.6) 9(0,-6.4) 10(0,-7.2) 11(0,-8) 23(12,-8) 24(12,-7.2) 25(12,-6.4) 26(12,-5.6) 27(12,-4.8) 28(12,-4) 29(12,-3.2) 30(12,-2.4) 31(12,-1.6) 32(12,-0.8) 33(12,0)
  rect 0.5x1.8 smd: 12(2,-10) 13(2.8,-10) 14(3.6,-10) 15(4.4,-10) 16(5.2,-10) 17(6,-10) 18(6.8,-10) 19(7.6,-10) 20(8.4,-10) 21(9.2,-10) 22(10,-10) 34(10,2) 35(9.2,2) 36(8.4,2) 37(7.6,2) 38(6.8,2) 39(6,2) 40(5.2,2) 41(4.4,2) 42(3.6,2) 43(2.8,2) 44(2,2)
  silkscreen extent -2.4,-12.4 14.3,4.3
QFP14X14_64 [mm]
  oval 1.8x0.5 smd: 1(0,0)
  rect 1.8x0.5 smd: 2(0,-0.8) 3(0,-1.6) 4(0,-2.4) 5(0,-3.2) 6(0,-4) 7(0,-4.8) 8(0,-5.6) 9(0,-6.4) 10(0,-7.2) 11(0,-8) 12(0,-8.8) 13(0,-9.6) 14(0,-10.4) 15(0,-11.2) 16(0,-12) 33(16,-12) 34(16,-11.2) 35(16,-10.4) 36(16,-9.6) 37(16,-8.8) 38(16,-8) 39(16,-7.2) 40(16,-6.4) 41(16,-5.6) 42(16,-4.8) 43(16,-4) 44(16,-3.2) 45(16,-2.4) 46(16,-1.6) 47(16,-0.8) 48(16,0)
  rect 0.5x1.8 smd: 17(2,-14) 18(2.8,-14) 19(3.6,-14) 20(4.4,-14) 21(5.2,-14) 22(6,-14) 23(6.8,-14) 24(7.6,-14) 25(8.4,-14) 26(9.2,-14) 27(10,-14) 28(10.8,-14) 29(11.6,-14) 30(12.4,-14) 31(13.2,-14) 32(14,-14) 49(14,2) 50(13.2,2) 51(12.4,2) 52(11.6,2) 53(10.8,2) 54(10,2) 55(9.2,2) 56(8.4,2) 57(7.6,2) 58(6.8,2) 59(6,2) 60(5.2,2) 61(4.4,2) 62(3.6,2) 63(2.8,2) 64(2,2)
  silkscreen extent -2.4,-16.4 18.3,4.3
RB8/3.5 [mil]
  rect 70x70 hole 27.56: 1(0,60)
  round 70 hole 27.56: 2(0,-60)
  silkscreen extent -160,-160 160,160
RCA_MR551L [mm] "Schurter RCA PCB Socket (Farnell 152-396)"
  round 3.5 hole 2.5: 1(8,5.3) 2(0,0)
  round 1.3 hole 1.5 unplated: M1(0,3.75) M2(0,-3.75)
  round 1.5 hole 1.7 unplated: M3(6.5,0)
  silkscreen extent -2,-5.5 10.5,5.5
"SCREW M3" [mil]
  round 270 hole 125: 1(0,0)
SIMID1008-A [mm]
  rect 1.05x1.6 smd: 1(-1.25,0) 2(1.25,0)
  silkscreen extent -1,-1.2 1,1.2
"SMD _LED" [mm]
  rect 1.3x1.6 smd: 1(0.95,0) 2(-0.95,0)
  silkscreen extent -2.13,-1.15 2,1.15
SO-J32 [mm]
  rect 0.6x2.2 smd: 1(-9.525,-3.6) 2(-8.255,-3.6) 3(-6.985,-3.6) 4(-5.715,-3.6) 5(-4.445,-3.6) 6(-3.175,-3.6) 7(-1.905,-3.6) 8(-0.635,-3.6) 9(0.635,-3.6) 10(1.905,-3.6) 11(3.175,-3.6) 12(4.445,-3.6) 13(5.715,-3.6) 14(6.985,-3.6) 15(8.255,-3.6) 16(9.525,-3.6) 17(9.525,3.6) 18(8.255,3.6) 19(6.985,3.6) 20(5.715,3.6) 21(4.445,3.6) 22(3.175,3.6) 23(1.905,3.6) 24(0.635,3.6) 25(-0.635,3.6) 26(-1.905,3.6) 27(-3.175,3.6) 28(-4.445,3.6) 29(-5.715,3.6) 30(-6.985,3.6) 31(-8.255,3.6) 32(-9.525,3.6)
  silkscreen extent -10.5,-4.19 10.33,4.19
SOIC8 [mm]
  rect 1.5x0.5 smd: 1(0,0) 2(0,-1.27) 3(0,-2.54) 4(0,-3.81) 5(6,-3.81) 6(6,-2.54) 7(6,-1.27) 8(6,0)
  silkscreen extent 1.1,-4.5 4.9,0.7
TO220-5V [mil] "TO220 5-lead, molded, stagger bend package."
  round 80 hole 50: 1(0,-157.48) 2(66.93,0) 3(133.86,-157.48) 4(200.79,0) 5(267.72,-157.48)
  silkscreen extent -67,-20 335,169
VO20 [mm]
  rect 0.3x1.65 smd: 1(-2.925,-2.775) 2(-2.275,-2.775) 3(-1.625,-2.775) 4(-0.975,-2.775) 5(-0.325,-2.775) 6(0.325,-2.775) 7(0.975,-2.775) 8(1.625,-2.775) 9(2.275,-2.775) 10(2.925,-2.775) 11(2.925,2.775) 12(2.275,2.775) 13(1.625,2.775) 14(0.975,2.775) 15(0.325,2.775) 16(-0.325,2.775) 17(-0.975,2.775) 18(-1.625,2.775) 19(-2.275,2.775) 20(-2.925,2.775)
  silkscreen extent -3.75,-2.9 3.3,1.55

## Part data
C1 C3 C4 C5 C6 C7 C8 C9 C10 C11 C12 C13 C14 C15 C16 C17 C19 C20 C21 C22 C23 C24 C25 C26 C27 C28 C29 C30 C31 C32 C33 C34 C35 C36 C38 C39 C40 C42 C43 C44 C46 C47 C48 C49 C50 C51 C52 C53 C54 C55 C56 C57 C59 C60 C61 C62 C63 C64 C65 C66 C67 C68 C69 C70 C73 C74 C75 C76 C77 C78 C79 C81 C82 C83 C84 C85 C86 C88 C89 C90 C91 C93 C94 C95 C97 C98 C99 C100 C101 C102 C103 C104 C105 C106 C107 C108 C109 C110 C111 C112 C113 C114: library part CAP, "Capacitor"
C2 C18 C37 C41 C45 C58 C71 C72 C80 C87 C92 C96: library part CAP_POLAR, "Polar Capacitor"
HDR1 HDR2 HDR3 HDR4: "Header, 2-Pin"
J1 J2 J3 J4 J5: "RCA Socket"
J6: "Low Voltage Power Supply Sonnector"
JP1: library part "Header 2X2", "Header, 2-Pin, Dual row"
JP2 JP3: "Header, 10-Pin, Dual row"
JP4: "Header, 5-Pin, Dual row"
L1 L2 L6 L8 L9 L10 L11 L12 L13 L14: library part FERRITE_BEAD, "BMB Series Ferrite Chip Bead"
LED1 LED2 LED3 LED4 LED5: "Typical RED GaAs SMD LED Agilent make"
R1 R2 R3 R4 R5 R6 R7 R8 R9 R10 R11 R12 R13 R14 R15 R16 R17 R18 R19 R20 R21 R22 R23 R24 R25 R26 R27 R28 R29 R30 R31 R32 R33 R34 R35 R36 R37 R38 R39 R40 R41 R42 R43 R44 R45 R46 R47 R48 R49 R50 R51 R52 R53 R54 R55 R56 R57 R58 R59 R60 R61 R62 R63 R64 R65 R66 R67 R68 R69 R70 R71 R72 R73 R74 R75 R76 R77 R78 R79 R80: library part RES, "Resistor"
S1: library part PCB_MOUNT_SWITCH, "SPDT Subminiature Toggle Switch"
SW1 SW2 SW3 SW4: "SPNA SMD Keyboard Switch"
U1 U2: "Philips Enhanced Video Input Processor"
U3: library part SAA7121H, "Philips Digital Video Encoder"
U4: "128K x 8 bit Fast Static RAM"
U5: "XCF00S Series, Platform Flash In-System Programmable Configuration 3.3V PROM, 1-Megabit, Commercial Grade"
U6 U9: library part LP3961ET, "800mA Fast UL Dropout Regulator"
U7: "Spartan-IIE 1.8V FPGA, 208-Pin PQFP, Standard Performance, Commercial Grade"
U8: "TI Dual Voltage MPU Supervisory Circuit"
X1 X2: library part CRYSTAL

## Via types
v1: diameter 40, hole 28, Top Layer to Bottom Layer, 433 vias

## Nets (pads, with @x,y where several pads share a name; then routed paths per layer and width w, separated by ;. In a path a pad name is that pad's centre, name@x,y a point inside that pad or via, vN(x,y) a via of type N, cw(c..) or ccw(c..) an arc to the next point about the centre after c; other vN are vias at no path point)
A0: U4.1 U7.162 | length 1001.4
  Top Layer w8: U7.162@1656.43,3213.36 1656.43,3169.06 1490,3002.63 1490,2800 1725,2565 U4.1@1725,2378.27
A1: U4.2 U7.164 | length 1090.8
  Top Layer w8: U7.164@1695.8,3213.36 1695.8,3163.18 1522,2989.37 1522,2813.25 1598.25,2737 1733,2737 1750,2720 1750,2530 1775,2505 U4.2@1775,2378.27
A2: U4.3 U7.166 | length 1105.3
  Top Layer w8: U7.166@1735.17,3213.36 1735.17,3157.29 1554,2976.12 1554,2826.51 1611.51,2769 1753,2769 1800,2722 1800,2530 1825,2505 U4.3@1825,2378.27
A3: U4.4 U7.168 | length 1119.7
  Top Layer w8: U7.168@1774.54,3213.36 1774.54,3151.41 1586,2962.86 1586,2839.76 1624.76,2801 1773,2801 1850,2724 1850,2530 1875,2505 U4.4@1875,2378.27
A4: U4.13 U7.194 | length 871.8
  Top Layer w8: U7.194@2286.35,3213.36 2286.35,3156.27 2325,3117.63 2325,2762.63 2350,2737.63 2350,2530 2325,2505 U4.13@2325,2378.27
A5: U4.14 U7.199 | length 1046.7
  Top Layer w8: U4.14@2375,2378.27 2375,2505 2400,2530 2400,2722 2440,2762 2538.12,2762 2566,2789.88 2566,2983.49 2384.78,3164.71 U7.199@2384.78,3213.36
A6: U4.15 U7.201 | length 1026.4
  Top Layer w8: U7.201@2424.15,3213.36 2424.15,3170.6 2598,2996.75 2598,2776.63 2551.37,2730 2470,2730 2450,2710 2450,2530 2425,2505 U4.15@2425,2378.27
A7: U4.16 U7.203 | length 968.3
  Top Layer w8: U7.203@2463.52,3213.36 2463.52,3176.48 2630,3010 2630,2710 2475,2555 U4.16@2475,2378.27
A8: U4.17 U7.202 | length 697.7
  Top Layer w8: U7.202@2443.83,3213.36 2443.83,3173.54 2614,3003.37 2614,2770 2505.73,2661.73 U4.17@2475,2661.73
A9: U4.18 U7.200 | length 745.7
  Top Layer w8: U7.200@2404.46,3213.36 2404.46,3167.65 2582,2990.12 2582,2783.25 2544.75,2746 2450,2746 2425,2721 U4.18@2425,2661.73
A10: U4.19 U7.198 | length 761.3
  Top Layer w8: U7.198@2365.09,3213.36 2365.09,3161.77 2550,2976.86 2550,2796.51 2531.49,2778 2428,2778 2375,2725 U4.19@2375,2661.73
A11: U4.20 U7.193 | length 575.8
  Top Layer w8: U7.193@2266.67,3213.36 2266.67,3153.33 2309,3111 2309,2753.63 2325,2737.63 U4.20@2325,2661.73
A12: U4.21 U7.191 | length 571.4
  Top Layer w8: U7.191@2227.3,3213.36 2227.3,3147.45 2275,3099.75 U4.21@2275,2661.73
A13: U4.29 U7.169 | length 833.1
  Top Layer w8: U7.169@1794.23,3213.36 1794.23,3148.47 1602,2956.24 1602,2846.39 1631.39,2817 1783,2817 1875,2725 U4.29@1875,2661.73
A14: U4.30 U7.167 | length 818.7
  Top Layer w8: U7.167@1754.86,3213.36 1754.86,3154.35 1570,2969.49 1570,2833.14 1618.14,2785 1763,2785 1825,2723 U4.30@1825,2661.73
A15: U4.31 U7.165 | length 804.2
  Top Layer w8: U7.165@1715.49,3213.36 1715.49,3160.23 1538,2982.75 1538,2819.88 1604.88,2753 1743,2753 1775,2721 U4.31@1775,2661.73
A16: U4.32 U7.163 | length 756.2
  Top Layer w8: U7.163@1676.12,3213.36 1676.12,3166.12 1506,2996 1506,2806.63 1650.9,2661.73 U4.32@1725,2661.73
AIN0: J5.1 R8.1 R17.1 | length 5460.7
  Top Layer w8: v1(1780,200) R8.1@1780,262.6 ; v1(3160,200) R17.1@3160,262.6
  Bottom Layer w8: J5.1@474.96,2468.66 260,2253.7 260,550 440,370 440,170 510,100 1630,100 1730,200 v1(1780,200) 1830,200 1930,100 3060,100 v1(3160,200)
AIN1: J4.1 R6.1 R15.1 | length 4612.4
  Top Layer w8: v1(1580,200) R6.1@1580,262.6 ; v1(2960,200) R15.1@2960,262.6
  Bottom Layer w8: J4.1@474.96,1928.66 300,1753.7 300,570 480,390 480,230 580,130 1510,130 v1(1580,200) 1620,240 2270,240 2380,130 2890,130 v1(2960,200)
AIN2: J3.1 R4.1 R13.1 | length 3764.1
  Top Layer w8: v1(1380,200) R4.1@1380,262.6 ; v1(2760,200) R13.1@2760,262.6
  Bottom Layer w8: J3.1@474.96,1388.66 340,1253.7 340,590 520,410 520,290 650,160 1340,160 v1(1380,200) 1460,280 2330,280 2450,160 2720,160 v1(2760,200)
AIN3: J1.1 R2.1 R11.1 | length 2674.2
  Top Layer w8: v1(1180,200) R2.1@1180,262.6 ; v1(2560,200) R11.1@2560,262.6
  Bottom Layer w8: J1.1@474.96,848.66 474.96,685.04 780,380 840,320 1010,320 1130,200 v1(1180,200) 1230,200 1350,320 2440,320 v1(2560,200)
BLUE: JP1.5 R27.2 | length 1193.6
  Top Layer w8: R27.2@4237.4,1100 4240,1102.6 v1(4240,1180)
  Bottom Layer w8: JP1.5@3920,200 3970,250 3970,340 4140,510 4140,820 4240,920 v1(4240,1180)
CCLK: U5.3 U7.155 | length 1644.5
  Top Layer w8: v1(700,3240) 660,3200 660,3040 796,2904 796,2646.63 846.6,2596.02 U5.3@929.25,2596.02 ; v1(1200,3340) 1400,3340 1422.31,3317.69 U7.155@1473.36,3317.69
  Bottom Layer w8: v1(700,3240) 800,3340 v1(1200,3340)
CLKOUT: JP3.10 R49.1 U3.4 U7.40 U7.81 | length 5615.4
  Top Layer w8: v1(1950,4500) 2010.76,4439.24 U7.81@2010.76,4386.59 ; v1(2490,4090) 2514.28,4065.72 U7.40@2646.59,4065.72 2735.72,4065.72 2860,4190 3050,4190 3180,4060 3180,2640 2760,2220 JP3.10@2760,2170 2810,2120 2810,2040 2860,1990 3790,1990 3920,2120 4122.6,2120 R49.1@4182.6,2060 4125.51,2002.91 U3.4@4125.51,1920
  Bottom Layer w8: v1(1950,4500) 1950,4440 2000,4390 2320,4390 2490,4220 v1(2490,4090)
CSBAR: U4.5 U7.173 | length 856.6
  Top Layer w8: U7.173@1872.97,3213.36 1872.97,2757.03 1900,2730 1900,2530 1925,2505 U4.5@1925,2378.27
D0: U4.6 U7.178 | length 901
  Top Layer w8: U7.178@1970,3220 1970,3213.36 1970,3170 1926,3126 1926,2796.63 2000,2722.63 2000,2530 1975,2505 U4.6@1975,2378.27
D1: U4.7 U7.180 | length 905.4
  Top Layer w8: U7.180@2010.76,3213.36 2010.76,3165.51 1958,3112.75 1958,2809.88 2050,2717.88 2050,2600 2025,2575 U4.7@2025,2378.27
D2: U4.10 U7.187 | length 889.1
  Top Layer w8: U7.187@2148.56,3213.36 2148.56,3158.3 2227,3079.86 2227,2764 2200,2737 2200,2470 2175,2445 U4.10@2175,2378.27
D3: U4.11 U7.189 | length 878.6
  Top Layer w8: U7.189@2187.93,3213.36 2187.93,3164.19 2259,3093.12 2259,2749 2250,2740 2250,2530 2225,2505 U4.11@2225,2378.27
D4: U4.22 U7.188 | length 590.1
  Top Layer w8: U7.188@2168.24,3213.36 2168.24,3161.25 2243,3086.49 2243,2755.63 2225,2737.63 U4.22@2225,2661.73
D5: U4.23 U7.181 | length 862.4
  Top Layer w8: U7.181@2030.45,3213.36 2030.45,3162.57 1974,3106.12 1974,2816.51 2050.51,2740 2080,2740 2100,2720 2100,2600 2120,2580 2160,2580 2175,2595 U4.23@2175,2661.73
D6: U4.26 U7.179 | length 606.3
  Top Layer w8: U7.179@1991.08,3213.36 1991.08,3168.45 1942,3119.37 1942,2803.25 2025,2720.25 U4.26@2025,2661.73
D7: U4.27 U7.176 | length 587.7
  Top Layer w8: U7.176@1932.02,3213.36 1932.02,3170 1910,3147.98 1910,2790 1975,2725 U4.27@1975,2661.73
DIN: U5.1 U7.153 | length 1779.2
  Top Layer w8: v1(700,3340) 640,3280 640,3030 780,2890 780,2640 875.16,2544.84 U5.1@929.25,2544.84 ; v1(1280,3390) 1312.94,3357.06 U7.153@1473.36,3357.06
  Bottom Layer w8: v1(700,3340) 750,3390 v1(1280,3390)
DONE: R71.2 U5.10 U7.104 | length 2725.2
  Top Layer w8: R71.2@780,4502.6 v1(780,4450) 780,4340 800,4320 800,3060 1010,2850 1010,2800 985.16,2775.16 U5.10@929.25,2775.16 ; v1@1491.16,4410 1514.57,4386.59 U7.104@1558.01,4386.59
  Bottom Layer w8: v1(780,4450) 820,4490 970,4490 1050,4410 v1(1490,4410)
GND: C1.2 C2.2 C4.1 C7.1 C9.2 C10.2 C11.2 C13.1 C16.1 C18.2 C19.1 C20.1 C21.1 C22.1 C23.1 C24.1 C25.1 C26.1 C27.2 C28.2 C29.2 C30.2 C31.2 C32.2 C33.2 C35.2 C36.2 C37.2 C38.2 C39.2 C40.2 C41.2 C42.2 C43.2 C44.2 C45.2 C46.2 C47.2 C48.2 C49.2 C50.2 C51.2 C52.2 C53.2 C54.2 C55.1 C56.2 C57.2 C58.2 C59.1 C60.1 C61.2 C62.2 C63.2 C64.2 C65.1 C66.2 C67.2 C68.2 C69.2 C70.2 C71.2 C72.2 C73.2 C74.2 C75.2 C76.2 C77.2 C78.2 C79.2 C80.2 C81.1 C82.2 C83.2 C84.2 C85.2 C86.2 C87.2 C88.2 C89.2 C90.2 C91.2 C92.2 C93.2 C94.2 C95.2 C96.2 C97.1 C98.2 C99.1 C100.2 C101.2 C102.2 C103.2 C104.2 C105.2 C106.2 C107.2 C108.2 C109.2 C110.1 C111.2 C112.1 C113.2 C114.2 HDR1.1 HDR1.2 HDR2.1 HDR2.2 HDR3.1 HDR3.2 HDR4.1 HDR4.2 J1.2 J2.2 J3.2 J4.2 J5.2 J6.2 J6.3 JP1.2 JP1.4 JP1.6 JP1.8 JP2.20 JP3.20 JP4.9 JP4.10 M1.1 M2.1 M3.1 M4.1 R1.1 R3.1 R5.1 R7.1 R9.1 R12.1 R14.1 R16.1 R29.1 R34.1 R62.2 R74.2 R76.2 R77.2 R79.2 SW1.1 SW1.2 SW2.1 SW2.2 SW3.1 SW3.2 SW4.1 SW4.2 U1.5 U1.9 U1.13 U1.16 U1.19 U1.26 U1.32 U1.40 U1.56 U1.61 U2.5 U2.9 U2.13 U2.16 U2.19 U2.26 U2.32 U2.40 U2.56 U3.2 U3.3 U3.5 U3.18 U3.19 U3.21 U3.22 U3.32 U3.33 U3.35 U3.38 U3.44 U4.9 U4.25 U5.11 U6.3 U7.1 U7.12 U7.19 U7.25 U7.32 U7.39 U7.51 U7.65 U7.72 U7.79 U7.85 U7.92 U7.103 U7.117 U7.124 U7.131 U7.137 U7.144 U7.158 U7.170 U7.177 U7.183 U7.190 U7.197 U8.4 U9.3 | length 591.2
  Top Layer w8: SW1.2@102.52,2711.42 103.94,2710 v1(170,2710) ; SW2.2@102.52,3171.42 103.94,3170 v1(170,3170) ; SW3.2@102.52,3631.42 168.58,3631.42 v1(170,3630) ; SW4.2@102.52,4091.42 103.94,4090 v1(180,4090) ; v1(350,2710) 416.46,2710 SW1.1@417.87,2711.42 ; v1(350,3170) 416.46,3170 SW2.1@417.87,3171.42 ; v1(350,3630) 416.46,3630 SW3.1@417.87,3631.42 ; v1(350,4090) 351.42,4091.42 SW4.1@417.87,4091.42 ; HDR3.1@540,2800 HDR3.1@564.84,2775.16
  other v1: 500,160 700,200 780,200 860,200 1080,200 1280,200 1480,200 1680,200 2360,200 2460,200 2660,200 2860,200 3060,200 3260,200 550,210 630,260 3520,340 1130,390 1280,400 2660,400 2960,400 1580,410 600,460 3450,460 2100,560 2000,580 3380,580 650,610 990,610 2370,620 1700,700 2000,700 3080,700 3380,700 1320,800 1410,800 1520,800 2860,800 2300,810 920,820 2000,820 3380,820 2750,840 1600,900 160,910 3800,930 3980,930 4160,930 2780,960 3680,1000 1600,1060 2980,1060 760,1080 2140,1080 3380,1080 1200,1100 2580,1100 1930,1130 2280,1150 880,1170 4040,1180 4120,1180 4320,1180 4580,1180 1600,1200 2580,1220 3820,1220 1200,1230 1490,1230 2880,1240 3540,1270 3380,1340 3820,1340 1940,1410 3350,1420 3820,1440 4580,1440 160,1450 4300,1460 1870,1470 2590,1490 2030,1520 2270,1520 1800,1540 4000,1540 4220,1540 4580,1540 2590,1560 3520,1560 720,1580 820,1580 940,1580 3920,1600 1300,1620 1700,1620 3160,1620 4220,1650 3520,1660 4580,1660 3240,1700 3140,1740 4180,1820 4300,1920 160,1990 3920,2060 4580,2060 2020,2120 2120,2120 2220,2120 680,2160 3740,2180 4120,2180 1360,2250 3500,2250 2970,2260 4580,2280 780,2300 3440,2320 4510,2350 840,2360 2110,2470 3640,2520 2070,2530 2150,2530 2600,2540 1580,2580 2700,2660 3900,2700 4020,2700 1060,2720 2860,2730 3660,2780 700,2820 940,2820 2380,2820 2480,2820 2700,2820 1830,2840 1650,2870 2020,2880 1650,2930 2020,2940 2100,2940 3860,2980 3000,3020 3660,3180 2990,3200 2720,3240 1180,3260 4380,3280 1760,3300 2380,3310 1560,3360 4140,3380 2160,3420 1760,3440 1940,3440 2940,3440 1560,3460 1180,3480 2290,3480 3000,3490 3810,3500 2000,3540 2940,3540 2440,3560 1180,3580 3810,3580 2560,3650 1180,3680 2940,3740 1180,3780 1760,3780 3000,3790 2160,3800 2940,3840 2420,3860 2550,3920 1760,3960 3480,3960 1160,3980 3010,4040 1160,4080 3080,4090 3010,4140 3480,4140 2270,4190 1880,4200 4360,4230 1980,4240 2220,4260 2560,4280 1240,4300 1740,4310 1920,4310 1180,4360 1430,4470 1780,4630 1880,4630 2060,4630 2160,4630 2260,4630 2360,4630 2560,4630 2660,4630 2860,4630 3060,4630
INIT: R72.2 U5.8 U7.107 | length 2670.5
  Top Layer w8: R72.2@880,4502.6 v1(880,4450) 880,4380 820,4320 820,3070 1030,2860 1030,2770 983.98,2723.98 U5.8@929.25,2723.98 ; v1(1380,4220) 1422.57,4262.57 U7.107@1473.36,4262.57
  Bottom Layer w8: v1(880,4450) 980,4450 1170,4260 1340,4260 v1(1380,4220)
KEY0: R78.2 SW4.3 SW4.4 U7.75 | length 2549.1
  Top Layer w8: SW4.4@102.52,4268.19 SW4.3@417.87,4268.19 480,4330.32 480,4460 522.6,4502.6 R78.2@580,4502.6 v1(580,4450) ; v1(2070,4200) 2128.87,4258.87 U7.75@2128.87,4386.59
  Bottom Layer w8: v1(580,4450) 620,4450 890,4180 1630,4180 1660,4150 1960,4150 2010,4200 v1(2070,4200)
KEY1: R67.2 SW3.3 SW3.4 U7.74 | length 2516.1
  Top Layer w8: SW3.4@102.52,3808.19 SW3.3@417.87,3808.19 417.4,3808.66 R67.2@417.4,3900 460,3900 500,3940 500,4020 620,4140 v1(700,4140) ; v1(2060,4120) 2148.56,4208.56 U7.74@2148.56,4386.59
  Bottom Layer w8: v1(700,4140) 1610,4140 1640,4110 1980,4110 1990,4120 v1(2060,4120)
KEY2: R63.2 SW2.3 SW2.4 U7.73 | length 3050.6
  Top Layer w8: SW2.4@102.52,3348.19 SW2.3@417.87,3348.19 417.4,3348.66 R63.2@417.4,3440 460,3440 500,3480 500,3880 640,4020 v1(700,4020) ; v1(2140,4040) 2168.24,4068.24 U7.73@2168.24,4386.59
  Bottom Layer w8: v1(700,4020) 940,4020 1036,3924 1474,3924 1590,4040 v1(2140,4040)
KEY3: R55.2 SW1.3 SW1.4 U7.71 | length 3489.8
  Top Layer w8: SW1.4@102.52,2888.19 SW1.3@417.87,2888.19 397.4,2908.66 R55.2@397.4,2980 440,2980 540,3080 540,3810 620,3890 v1(700,3890) ; v1(2060,3960) 2140,3960 2220,4040 2220,4210 2260,4250 2260,4280 2207.61,4332.39 U7.71@2207.61,4386.59
  Bottom Layer w8: v1(700,3890) 1500,3890 1510,3900 2000,3900 v1(2060,3960)
LED0: R68.2 U7.63 | length 2390.7
  Top Layer w8: R68.2@417.4,4000 460,4000 480.16,4020.16 480.16,4040 600.16,4160 620,4160 v1(700,4240) ; v1(2340,4200) 2380,4200 2400,4220 2400,4270 2365.09,4304.91 U7.63@2365.09,4386.59
  Bottom Layer w8: v1(700,4240) 807.37,4240 870.16,4177.21 887.37,4160 1620,4160 1650,4130 1970,4130 2000,4160 2180,4160 2260,4240 2300,4240 v1(2340,4200)
LED1: R65.2 U7.62 | length 2849.3
  Top Layer w8: R65.2@417.4,3540 460,3540 480,3560 480,3897.37 520,3937.37 520,4017.37 582.63,4080 v1(620,4080) ; v1(2280,4120) 2360,4120 2420,4180 2420,4280 2384.78,4315.22 U7.62@2384.78,4386.59
  Bottom Layer w8: v1(620,4080) 917.37,4080 996.72,4000.65 1057.37,3940 1460,3940 1580,4060 2070,4060 2130,4120 v1(2280,4120)
LED2: R56.2 U7.61 | length 3193.7
  Top Layer w8: R56.2@397.4,3080 460,3080 520,3140 520,3850 v1(620,3950) ; v1(2340,4040) 2404.46,4104.46 2404.46,4130 2440,4165.54 2440,4290 2404.46,4325.54 U7.61@2404.46,4386.59
  Bottom Layer w8: v1(620,3950) 980,3950 1022,3908 1258,3908 1490,3908 1502,3920 1930,3920 2010,4000 2170,4000 2210,4040 v1(2340,4040)
LED3: R53.2 U7.60 | length 3586.3
  Top Layer w8: R53.2@397.4,2620 450,2620 480,2650 480,2997.37 560,3077.37 560,3760 v1(620,3820) ; v1(2280,3960) 2330,3960 2424.15,4054.15 2424.15,4120 2460,4155.85 2460,4300 2424.15,4335.85 U7.60@2424.15,4386.59
  Bottom Layer w8: v1(620,3820) 690,3820 740,3870 1510,3870 1520,3880 2050,3880 2130,3960 v1(2280,3960)
LLCA: JP2.10 R21.1 U7.80 U7.112 U7.182 | length 5059.8
  Top Layer w8: JP2.10@1360,2170 1410,2120 1410,2020 1990,1440 1990,992.6 R21.1@1937.4,940 ; U7.112@1473.36,4164.15 1565.85,4164.15 1620,4110 1910,4110 ; v1(2000,3380) 2050.13,3329.87 U7.182@2050.13,3213.36 ; U7.80@2030.45,4386.59 2030.45,4340.45 1940,4250 1940,4140 1910,4110 ; v1(2090,3470) 2090,3520 1940,3670 1940,4080 1910,4110
  Bottom Layer w8: JP2.10@1360,2170 1290,2240 1290,3010 1660,3380 v1(2000,3380) v1(2090,3470)
LLCB: JP2.19 R22.1 U7.125 U7.185 | length 5514
  Top Layer w8: v1(1440,3060) 1440,2572.63 1810,2202.63 1810,2160 1860,2110 JP2.19@1860,2070 1860,2010 2060,1810 3250,1810 3440,1620 3440,1062.6 R22.1@3317.4,940 ; U7.125@1473.36,3908.24 1621.76,3908.24 1667.35,3862.65 1667.35,3792.65 v1(2080,3380) 2109.19,3350.81 U7.185@2109.19,3213.36
  Bottom Layer w8: v1(1440,3060) 1520,3140 1840,3140 v1(2080,3380)
M0: R73.2 R74.1 U7.52 | length 452.5
  Top Layer w8: U7.52@2646.59,4301.94 2701.94,4301.94 2860,4460 R74.1@2860,4502.6 2842.6,4520 2820,4520 2762.6,4577.4 R73.2@2760,4577.4
M1: R75.2 R76.1 U7.50 | length 615.2
  Top Layer w8: U7.50@2646.59,4262.57 2692.57,4262.57 2820,4390 2910,4480 2910,4527.4 R75.2@2960,4577.4 2977.4,4560 2980,4560 3020,4520 3042.6,4520 R76.1@3060,4502.6 R76.1@3047.4,4502.6
M2: R79.1 R80.2 U7.54 | length 223.4
  Top Layer w8: R80.2@2460,4502.6 R79.1@2560,4502.6 2542.26,4484.86 U7.54@2542.26,4386.59
MPA0: JP2.2 R30.1 U7.111 | length 4796.2
  Top Layer w8: R30.1@1200,1557.4 1120,1637.4 1120,1880 1010,1990 1010,2120 JP2.2@960,2170 960,2220 1120,2380 1120,2800 840,3080 840,4300 1130,4590 v1(1620,4590) ; U7.111@1473.36,4183.83 1580.91,4183.83 1634.75,4130 1780,4130 1800,4150 v1(1800,4190)
  Bottom Layer w8: v1(1620,4590) 1800,4410 v1(1800,4190)
MPA1: JP2.3 R40.1 U7.110 | length 4397.9
  Top Layer w8: R40.1@1200,1737.4 1200,1860 1060,2000 JP2.3@1060,2070 1060,2110 1010,2160 1010,2230 1140,2360 1140,2810 860,3090 860,4290 1140,4570 1580,4570 v1(1660,4490) ; U7.110@1473.36,4203.52 1583.85,4203.52 1641.37,4146 1706,4146 1740,4180 v1(1740,4240)
  Bottom Layer w8: v1(1660,4490) 1660,4320 v1(1740,4240)
MPA2: JP2.4 R31.1 U7.109 | length 4436.9
  Top Layer w8: R31.1@1400,1557.4 1340,1617.4 1340,1780 1110,2010 1110,2120 JP2.4@1060,2170 1060,2240 1160,2340 1160,2820 880,3100 880,4280 1150,4550 1550,4550 v1(1570,4530) ; U7.109@1473.36,4223.2 1586.8,4223.2 1620,4190 v1(1680,4190)
  Bottom Layer w8: v1(1570,4530) 1640,4460 1640,4280 1680,4240 v1(1680,4190)
MPA3: JP2.5 R41.1 U7.108 | length 4016.4
  Top Layer w8: R41.1@1400,1737.4 1400,1780 1160,2020 JP2.5@1160,2070 1160,2110 1110,2160 1110,2250 1180,2320 1180,2830 900,3110 900,4270 1160,4530 1470,4530 v1(1490,4510) ; U7.108@1473.36,4242.89 1617.11,4242.89 v1(1620,4240)
  Bottom Layer w8: v1(1490,4510) 1520,4480 1590,4480 1620,4450 v1(1620,4240)
MPA4: JP2.6 R32.1 U7.102 | length 3862.6
  Top Layer w8: R32.1@1500,1550 R32.1@1500,1557.4 ; R32.1@1500,1560 R32.1@1500,1557.4 ; U7.102@1597.38,4386.59 1597.38,4462.62 1583.58,4476.42 1473.58,4476.42 1440,4510 1170,4510 920,4260 920,3120 1200,2840 1200,2300 1160,2260 JP2.6@1160,2170 1210,2120 1210,2020 1450,1780 1450,1635.22 1480,1605.22 1480,1577.4 R32.1@1500,1557.4
MPA5: JP2.7 R42.1 U7.101 | length 3668.8
  Top Layer w8: R42.1@1500,1737.4 1500,1790 1260,2030 JP2.7@1260,2070 1260,2110 1210,2160 1210,2250 1220,2260 1220,2850 940,3130 940,4250 1180,4490 1355.25,4490 1473.25,4372 1508,4372 1568,4312 1602,4312 1617.06,4327.06 U7.101@1617.06,4386.59
MPA6: JP2.8 R33.1 U7.100 | length 3870.2
  Top Layer w8: R33.1@1600,1557.4 1580,1577.4 1580,1605.22 1550,1635.22 1550,1790 1310,2030 1310,2120 JP2.8@1260,2170 1260,2460 1240,2480 1240,2860 960,3140 960,4240 1190,4470 1352.63,4470 1466.63,4356 1501.37,4356 1561.37,4296 1616,4296 1636.75,4316.75 U7.100@1636.75,4386.59
MPA7: JP2.9 R43.1 U7.99 | length 3678.5
  Top Layer w8: R43.1@1600,1737.4 1600,1780 1360,2020 JP2.9@1360,2070 1360,2110 1310,2160 1310,2440 1260,2490 1260,2870 980,3150 980,4230 1200,4450 1350,4450 1460,4340 1494.75,4340 1554.75,4280 1630,4280 1656.43,4306.43 U7.99@1656.43,4386.59